# Altium PCB T35_V2.1.PcbDoc (part 1 of 5)
Units mil, origin at the board's own origin, x right, y up, seen from the top; angles counter-clockwise.
Board outline 2372.44 x 1023.62 mil, 12 copper layers (TOP, L2-G, L3, L4-G, L5, L6-V, L7-V, L8, L9-G, L10, L11-G, BOTTOM), stack 62.192 mil thick; 356 components, 288 nets, 1478 pads, 832 vias.
Unrouted connection lines stored in the file: 19.
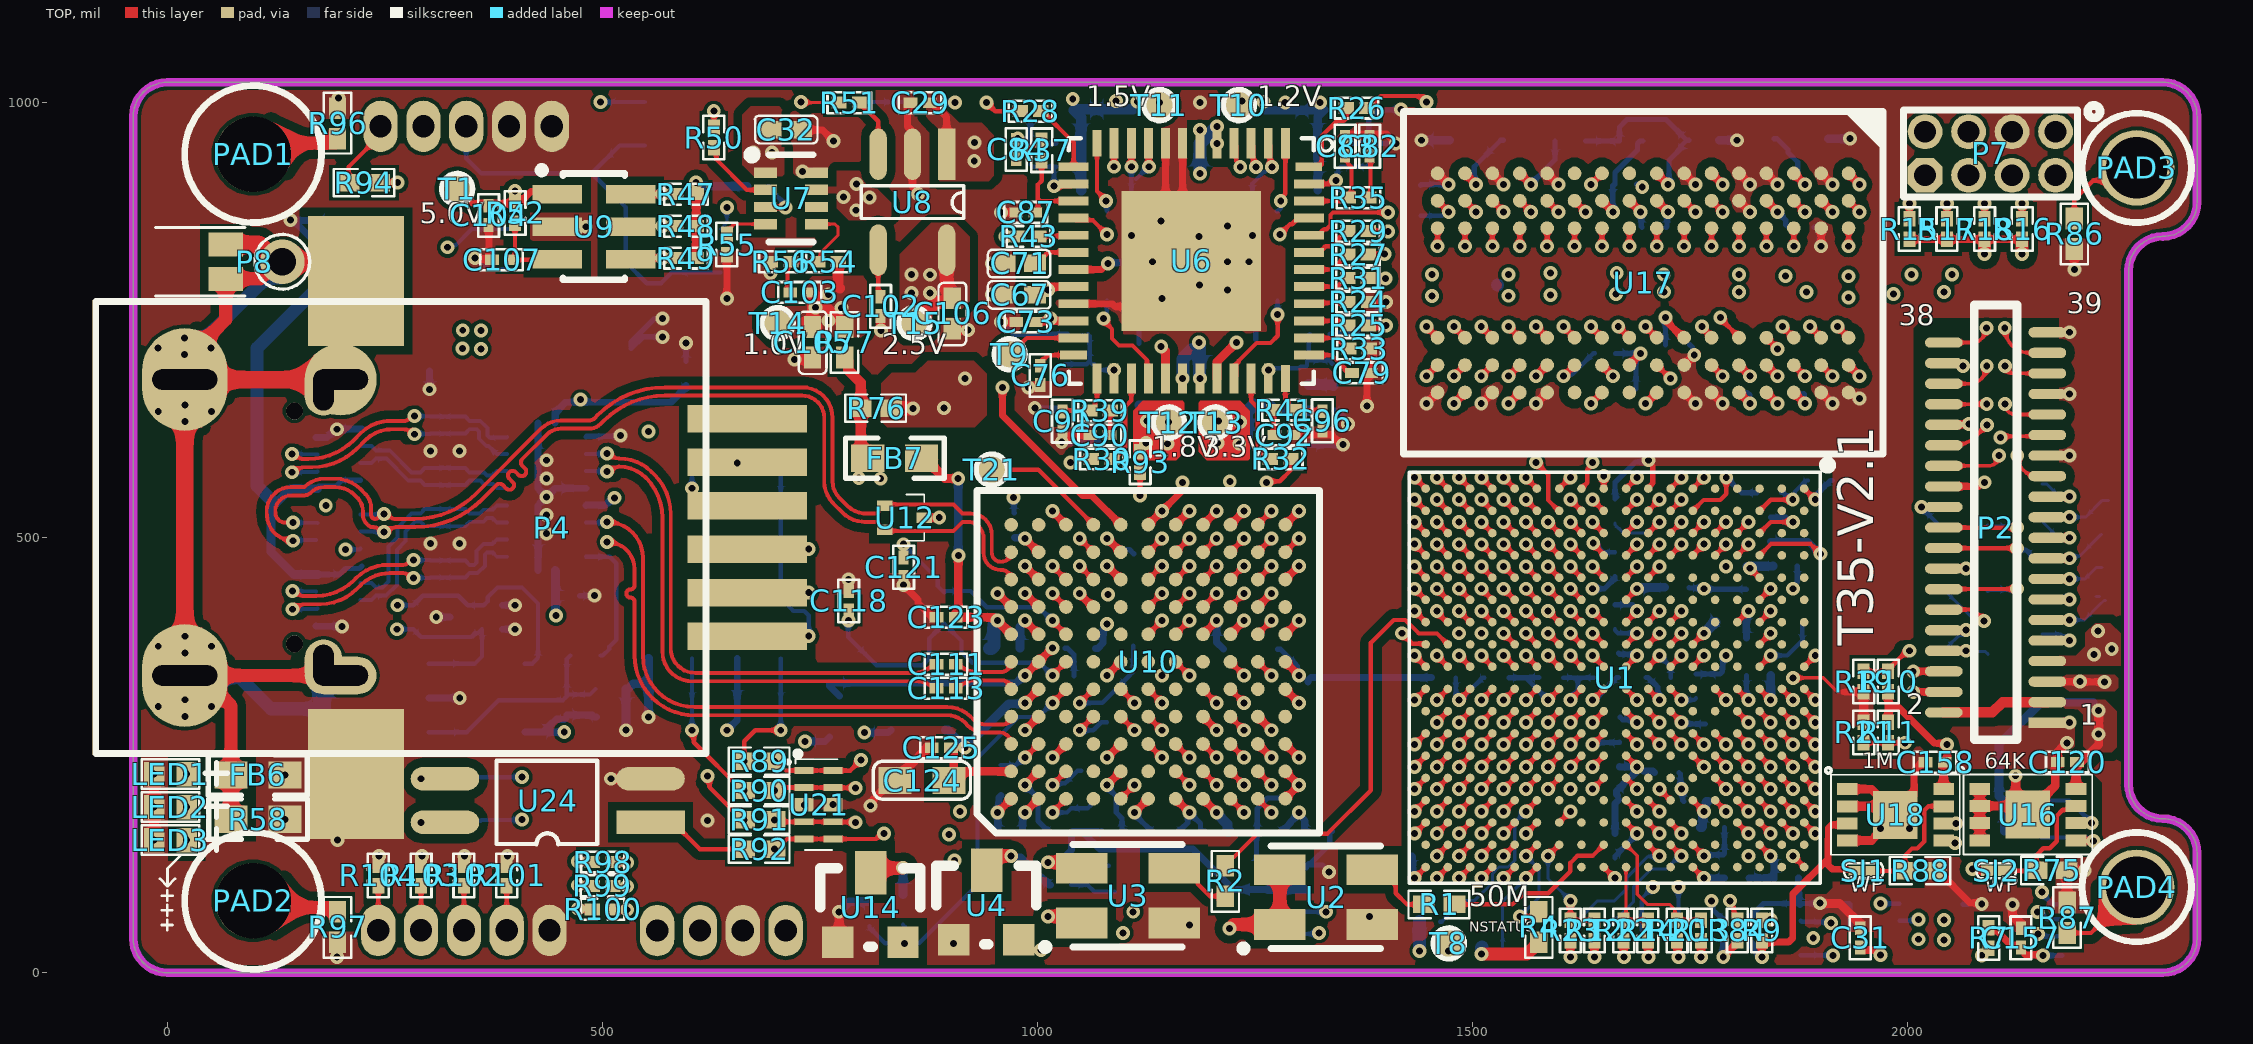
[diagram p0: TOP view]
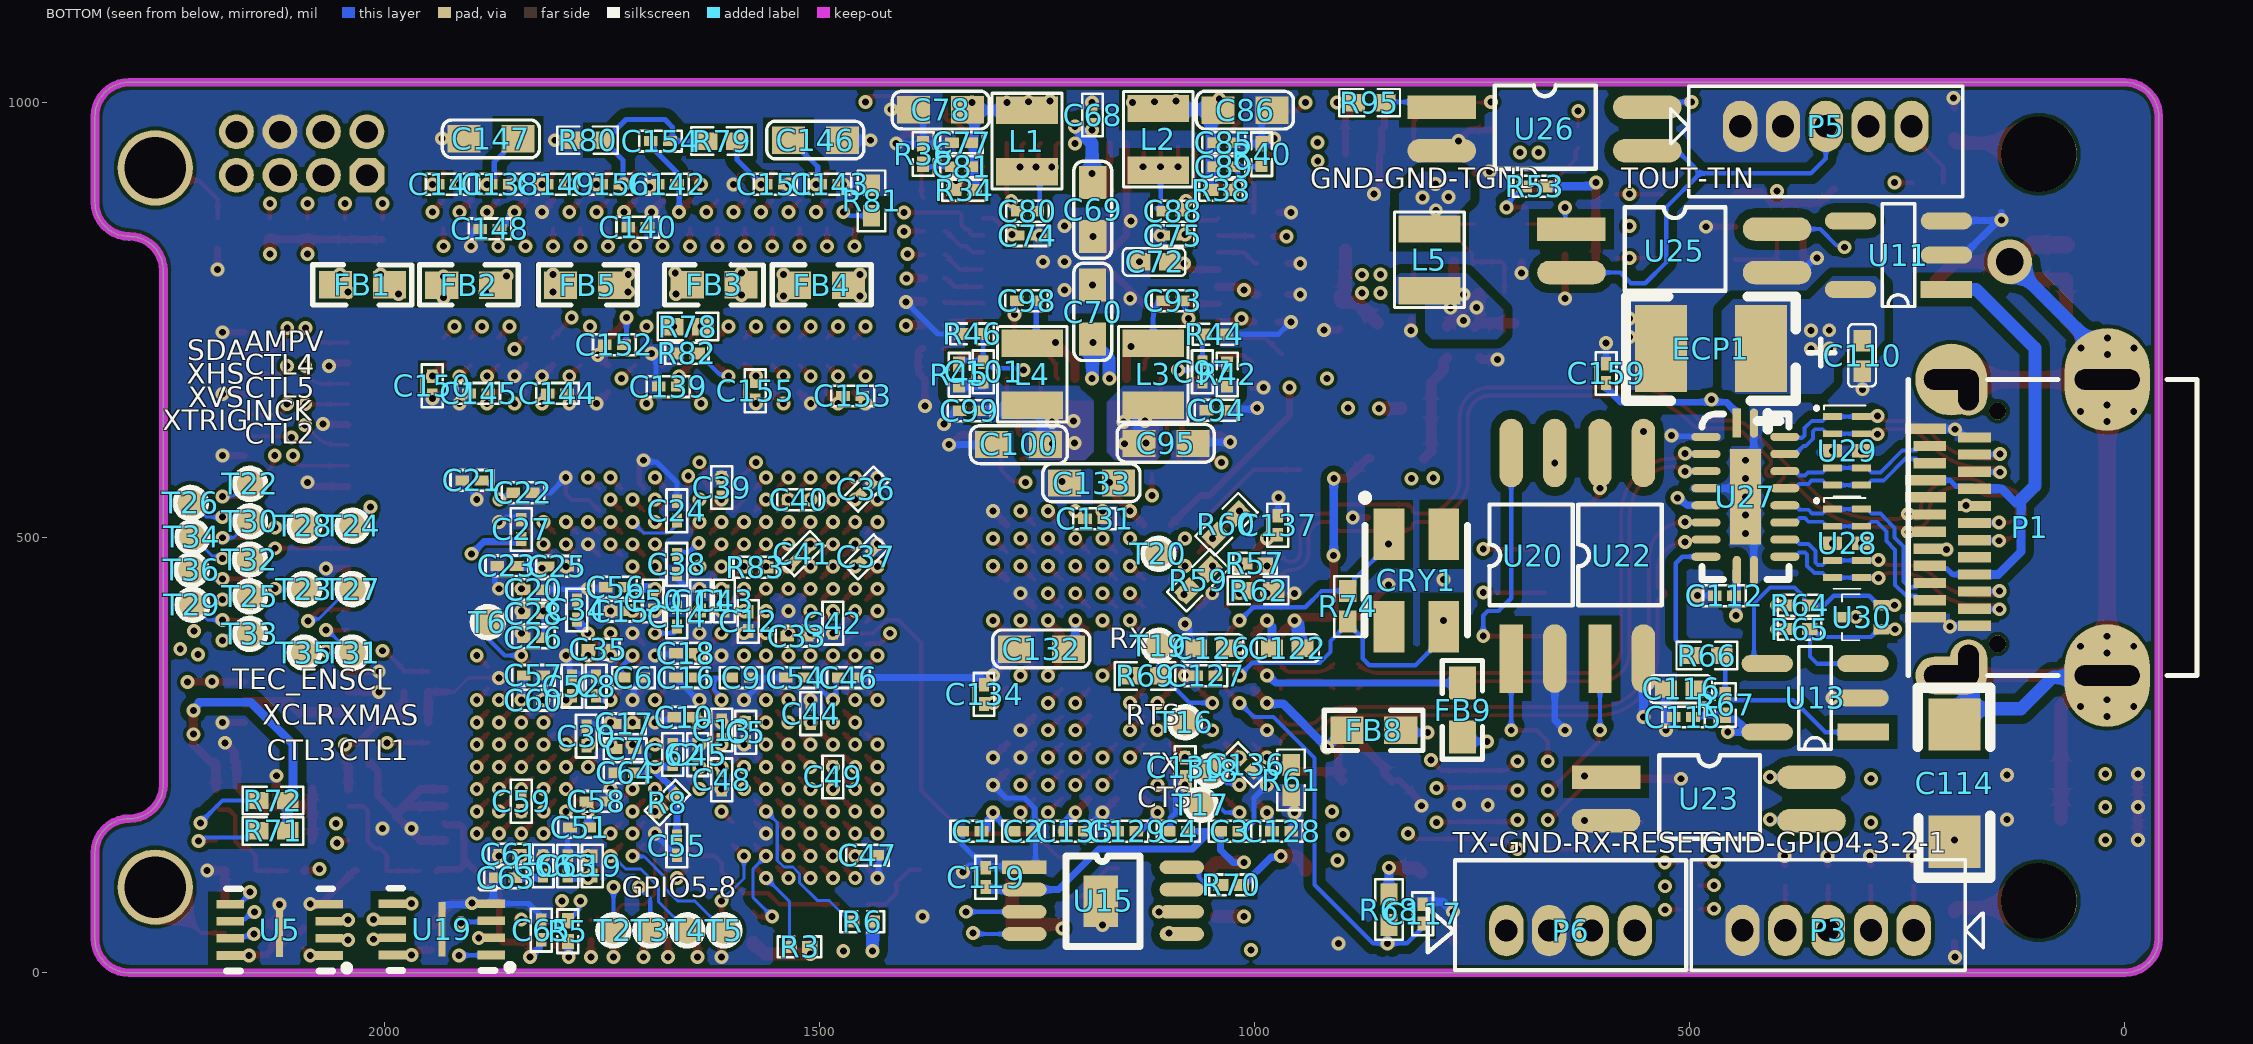
[diagram p1: BOTTOM view, seen from below]
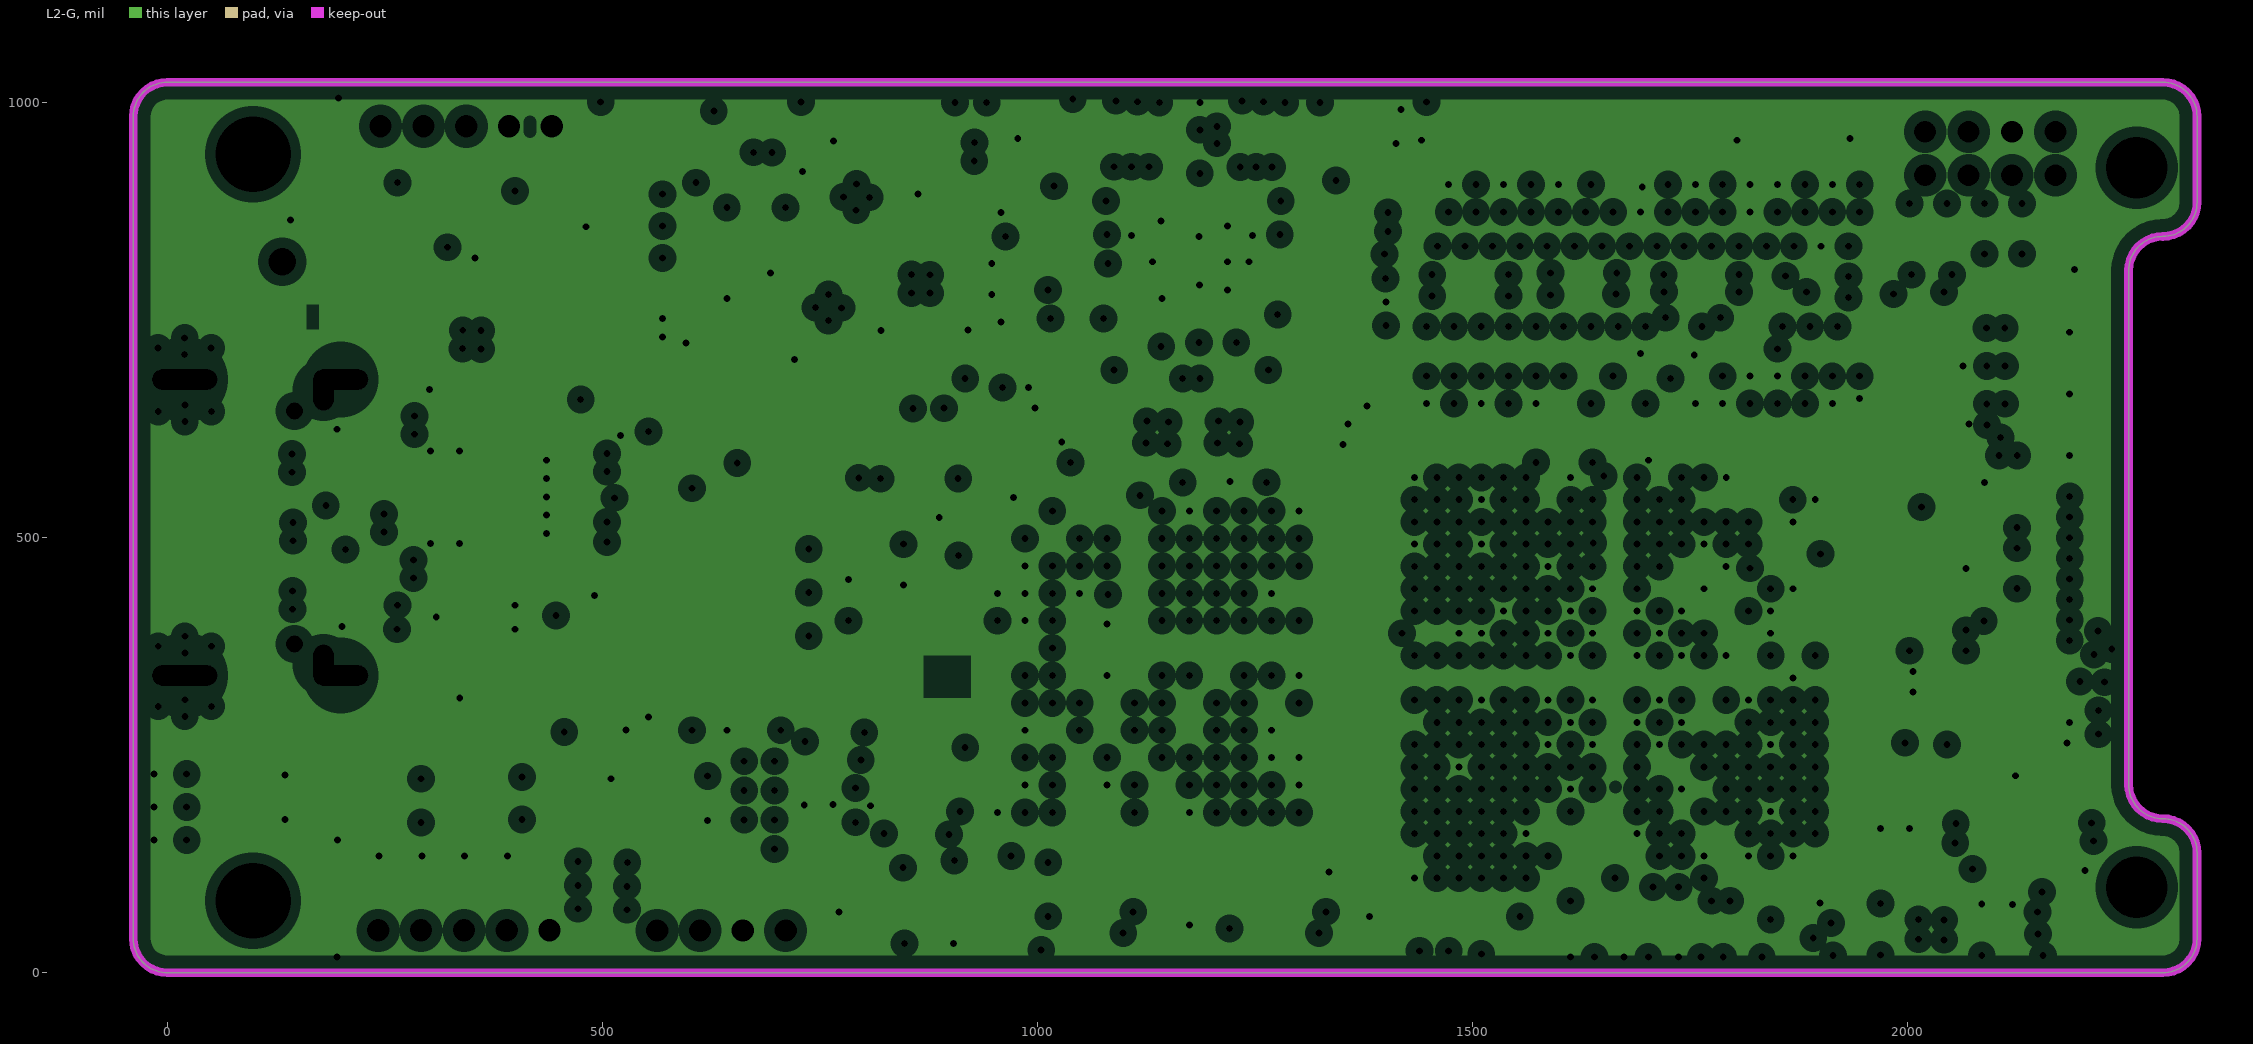
[diagram p2: L2-G, clearances drawn from the general rule]
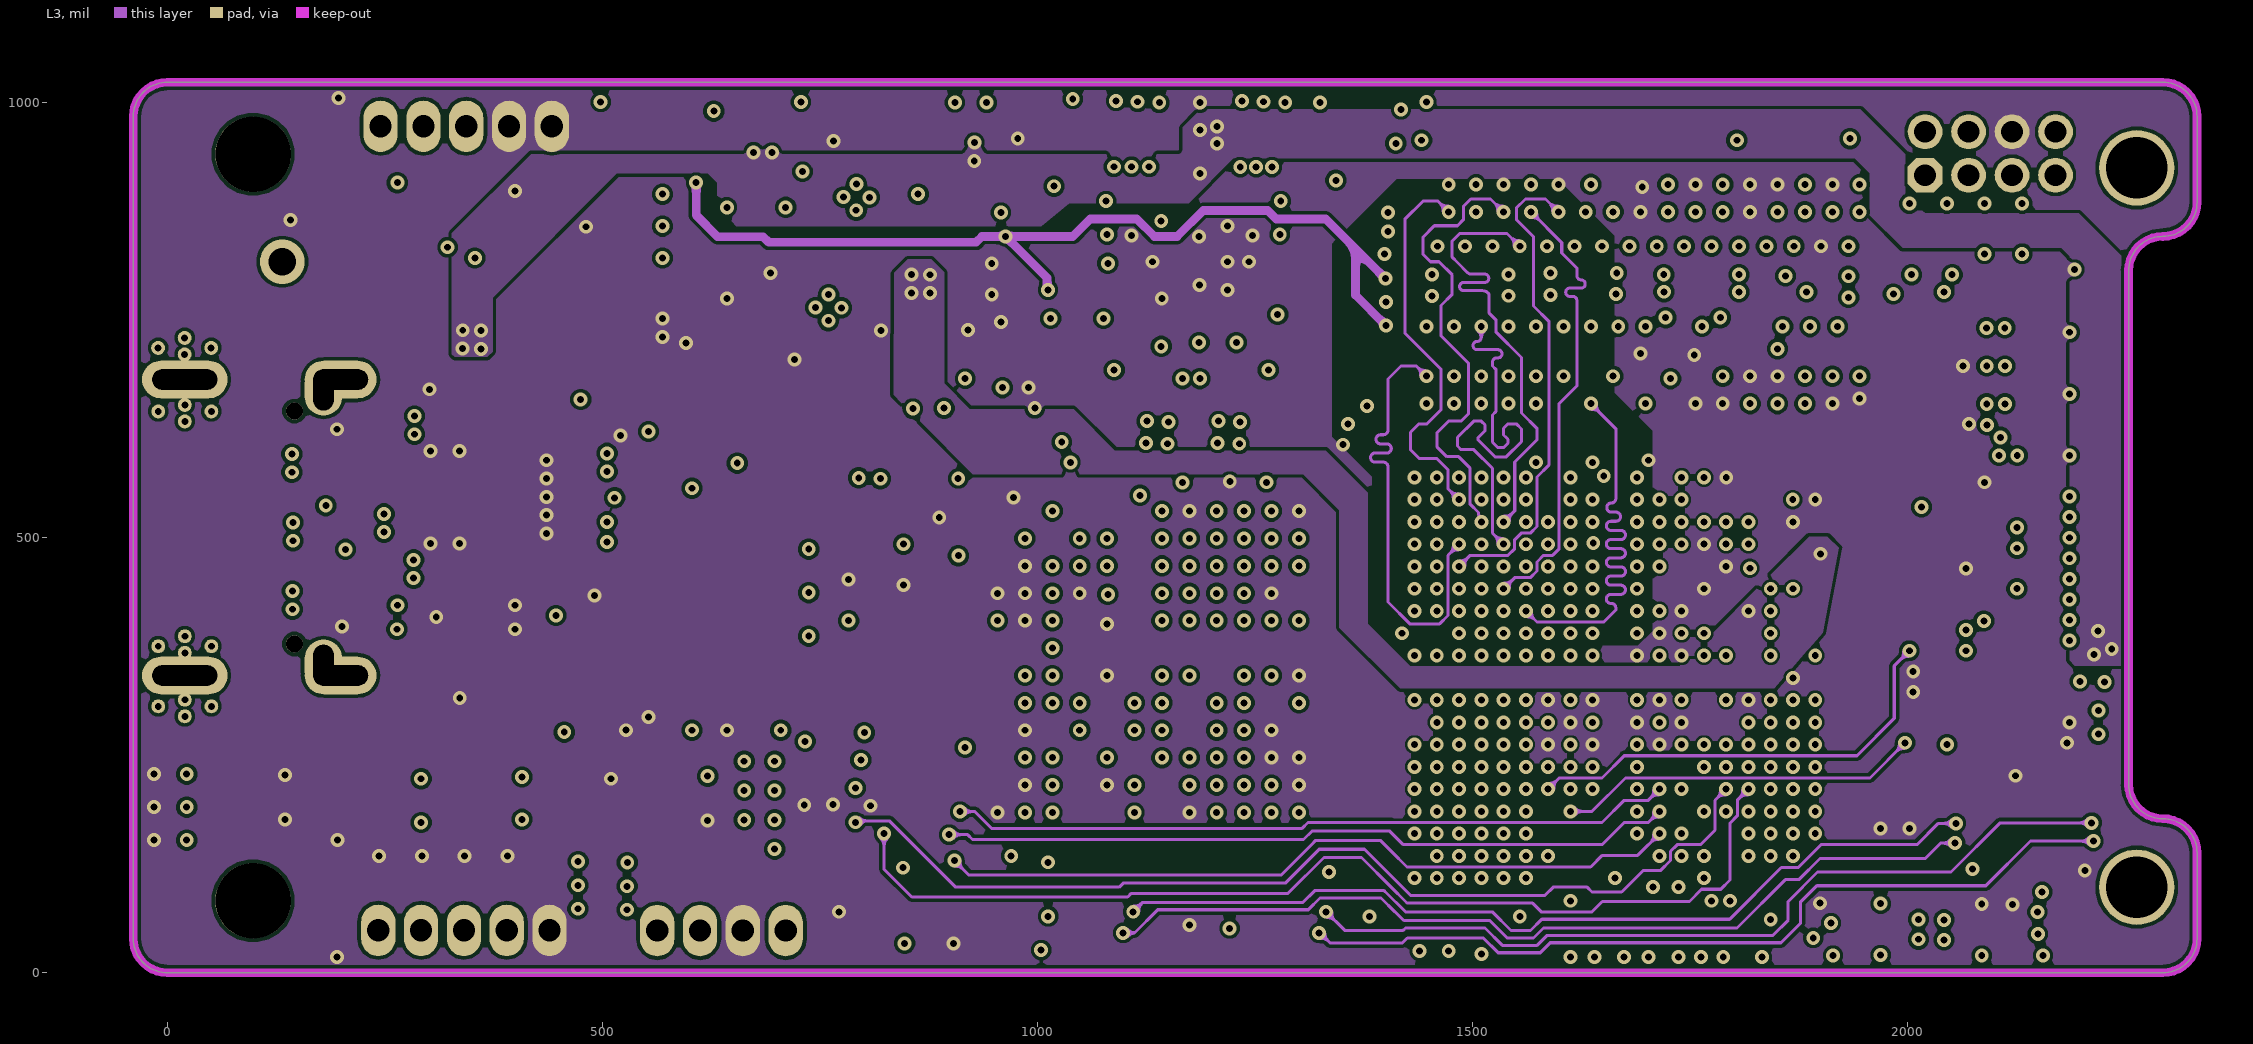
[diagram p3: L3]
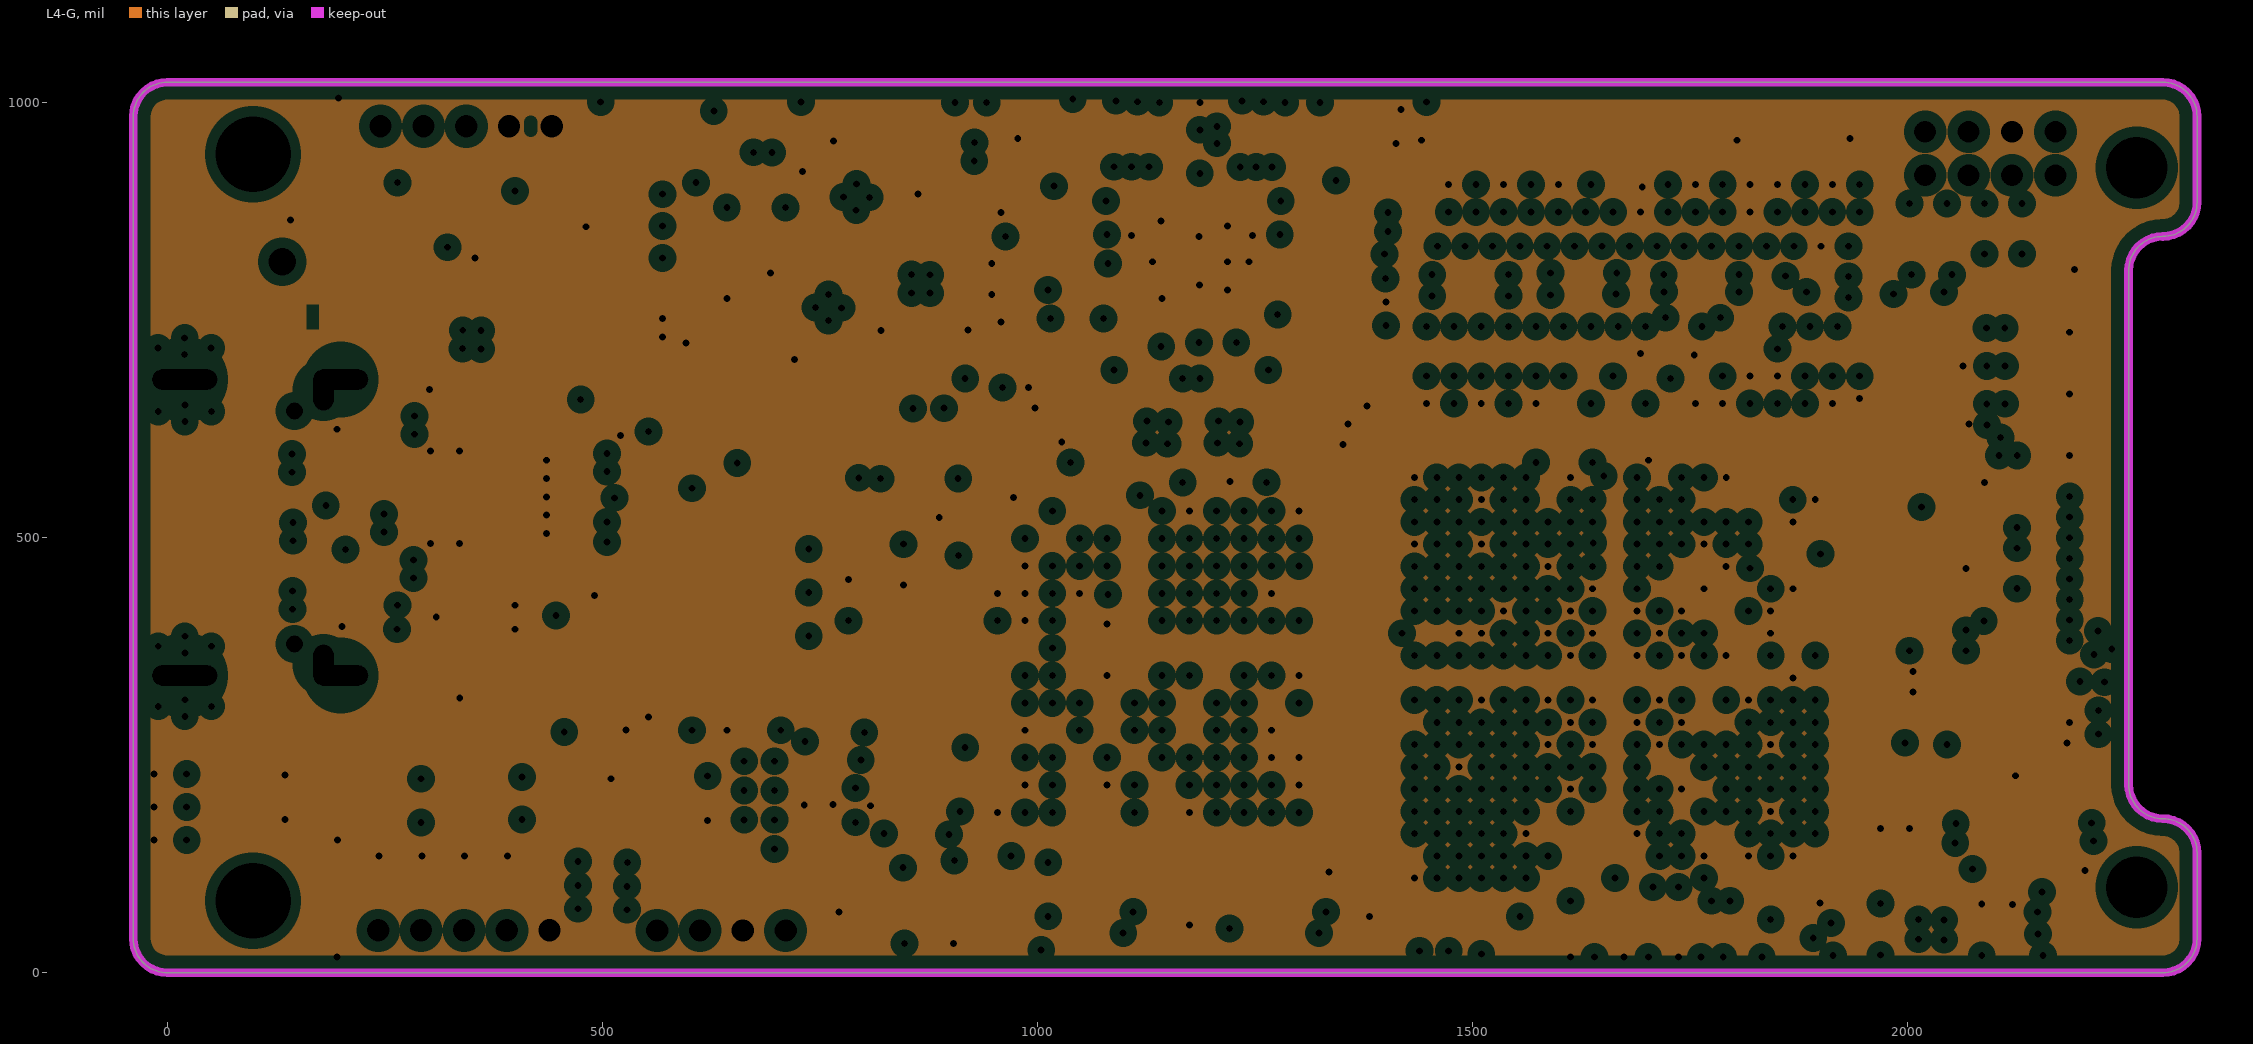
[diagram p4: L4-G, clearances drawn from the general rule]
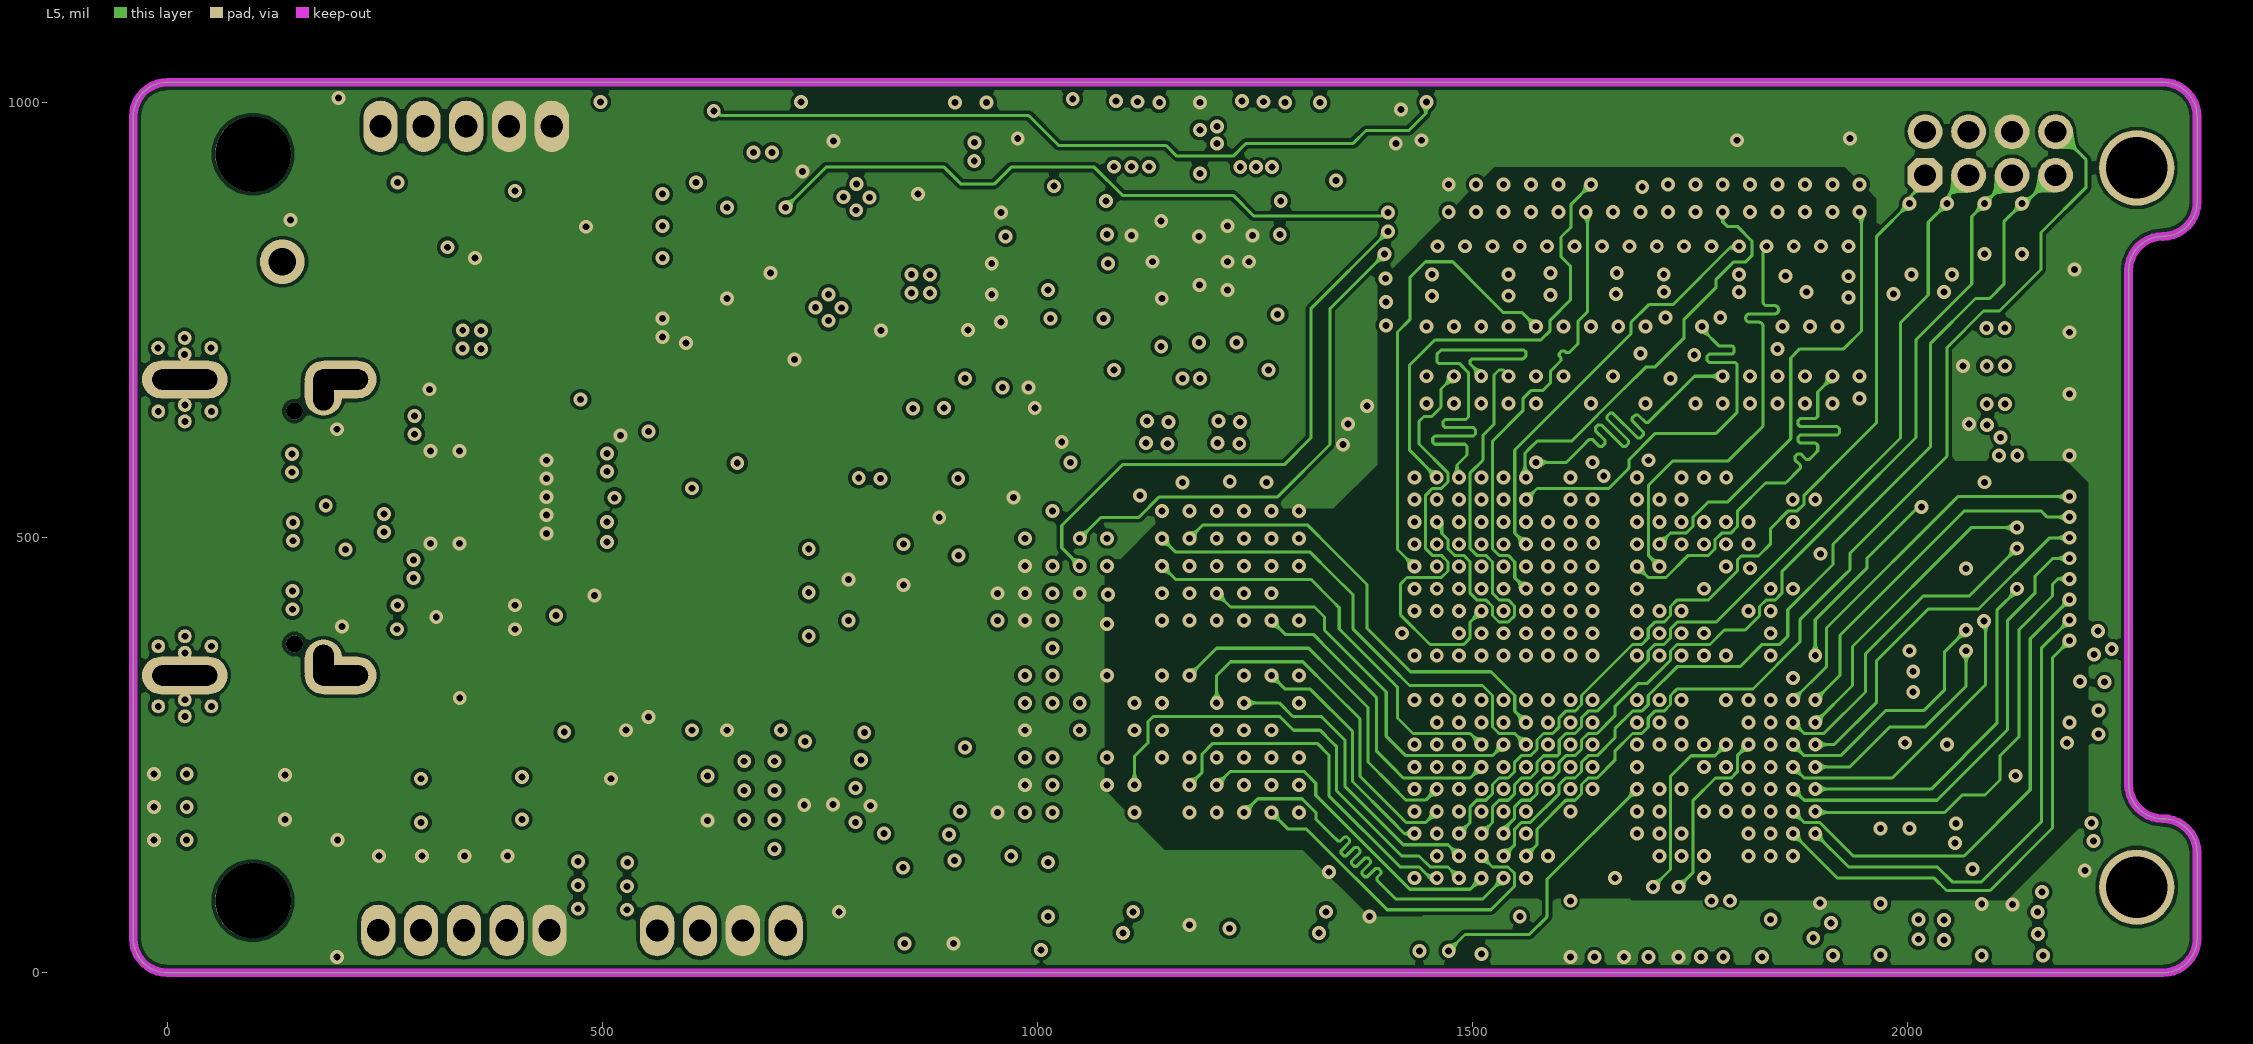
[diagram p5: L5]
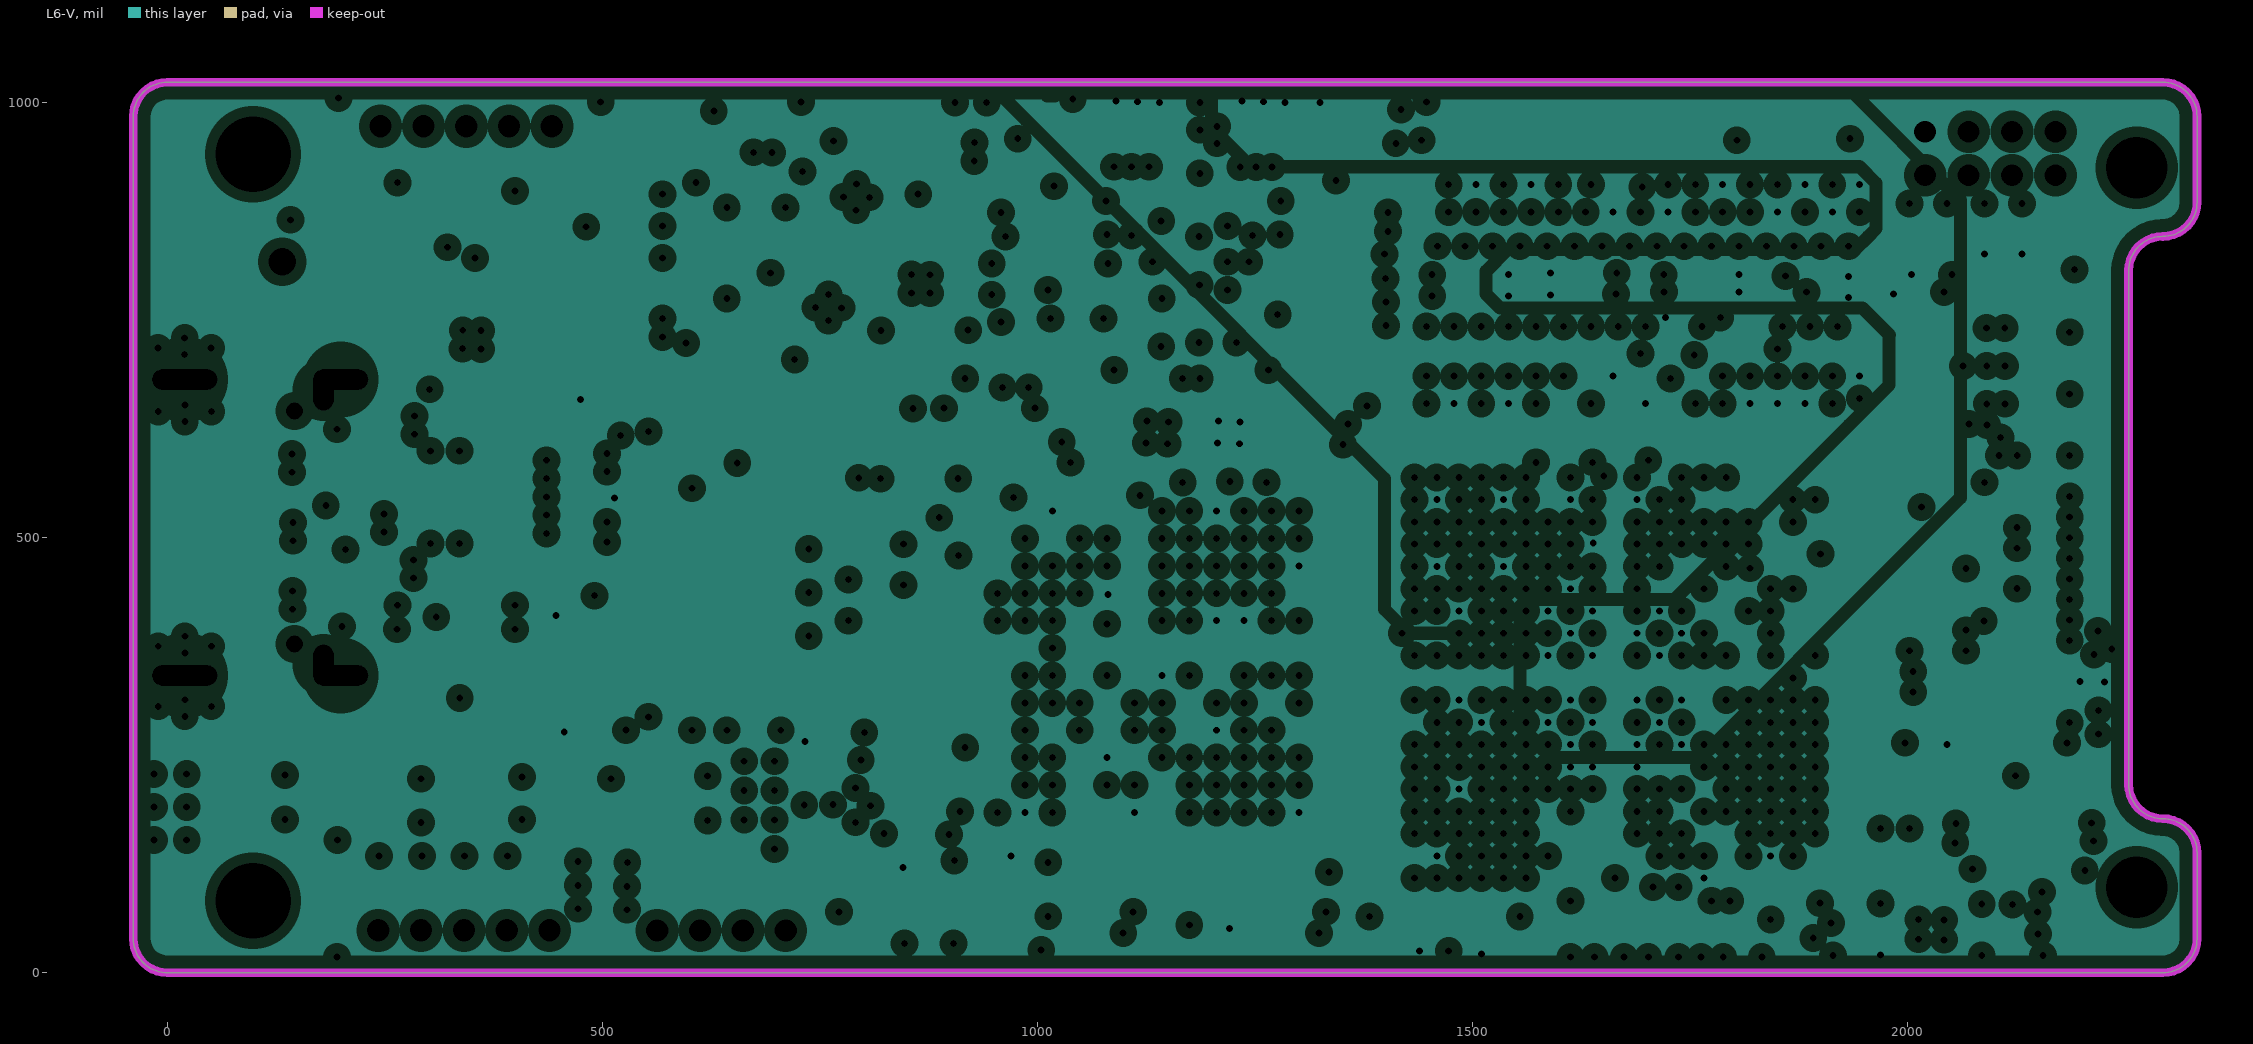
[diagram p6: L6-V, clearances drawn from the general rule]
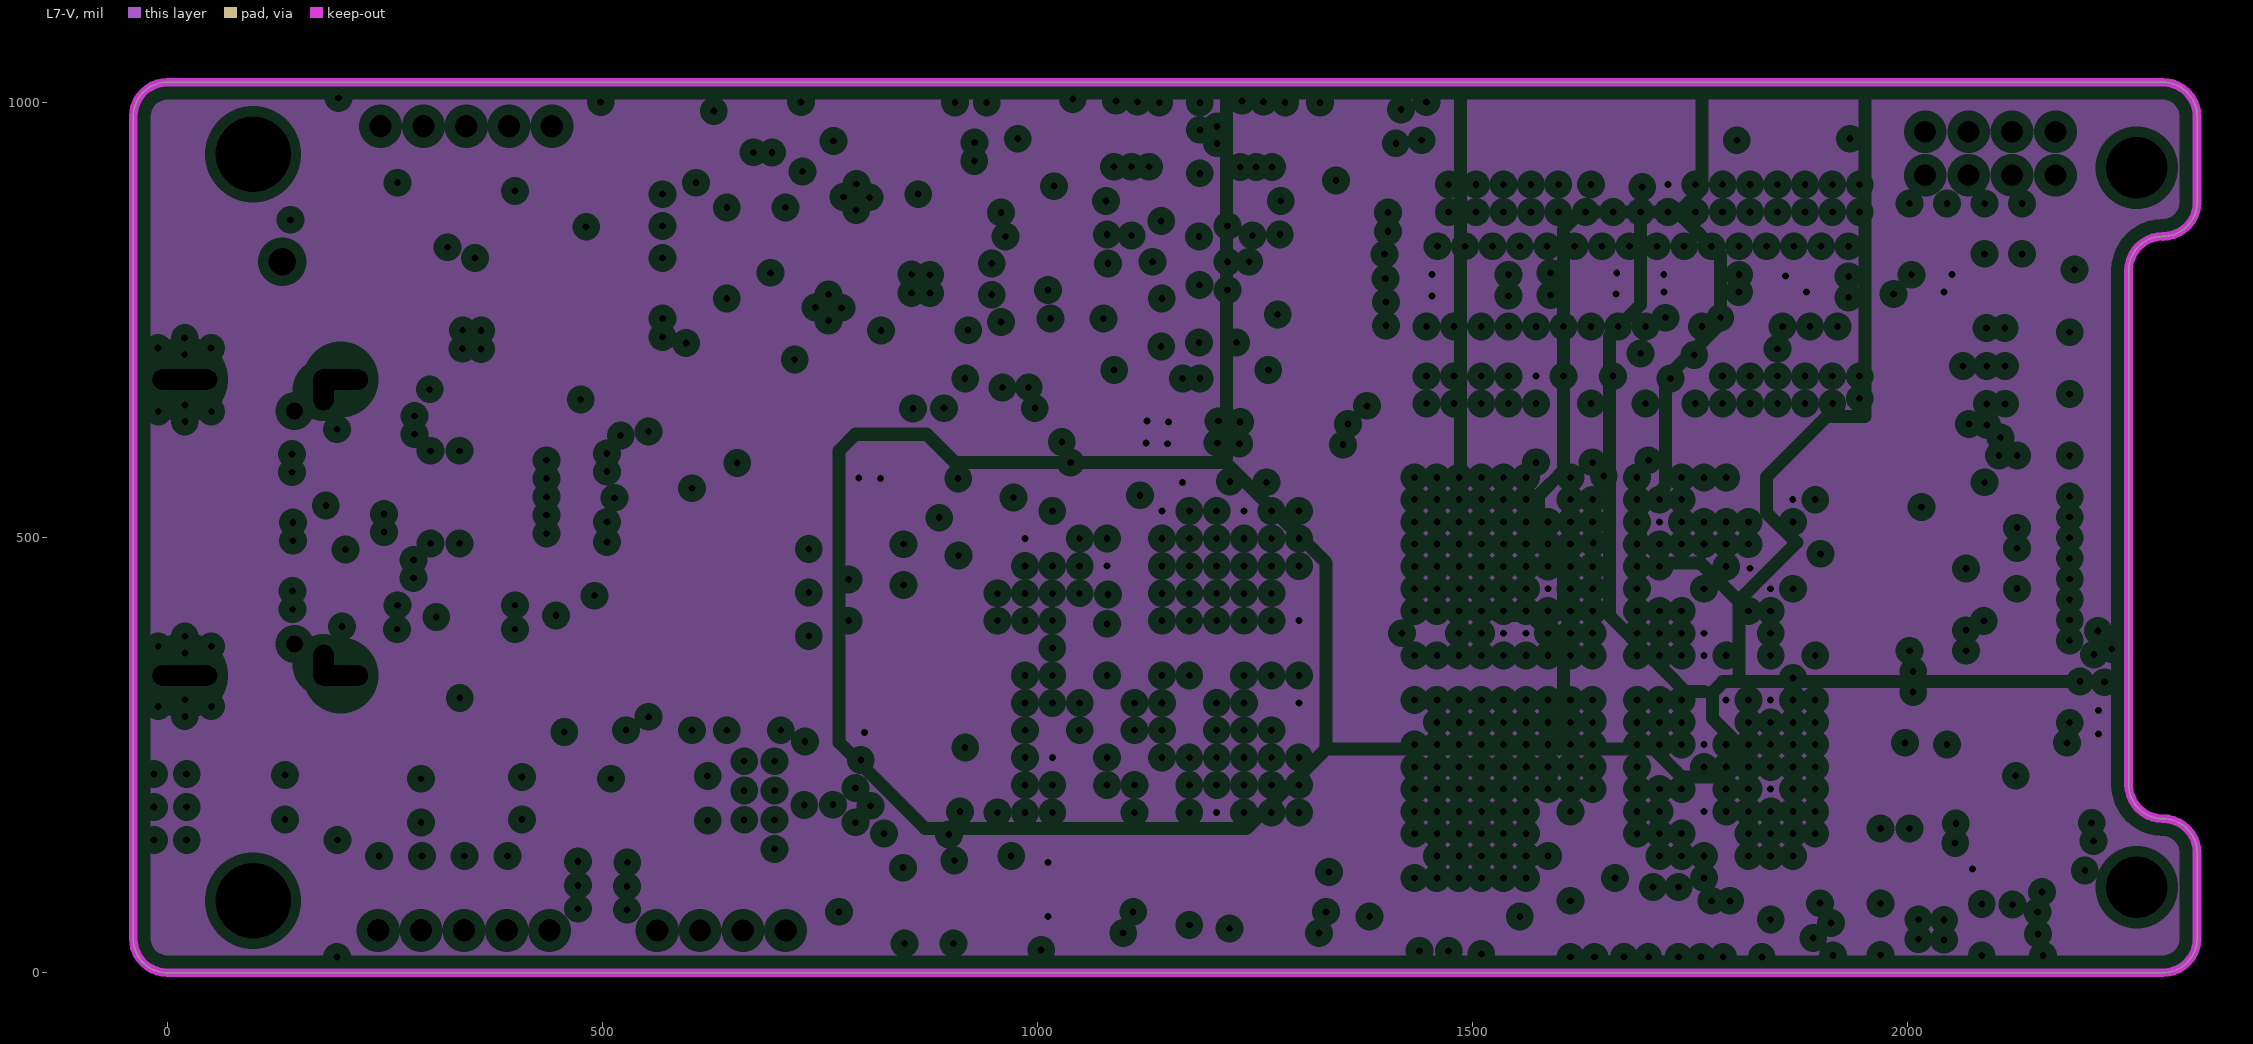
[diagram p7: L7-V, clearances drawn from the general rule]
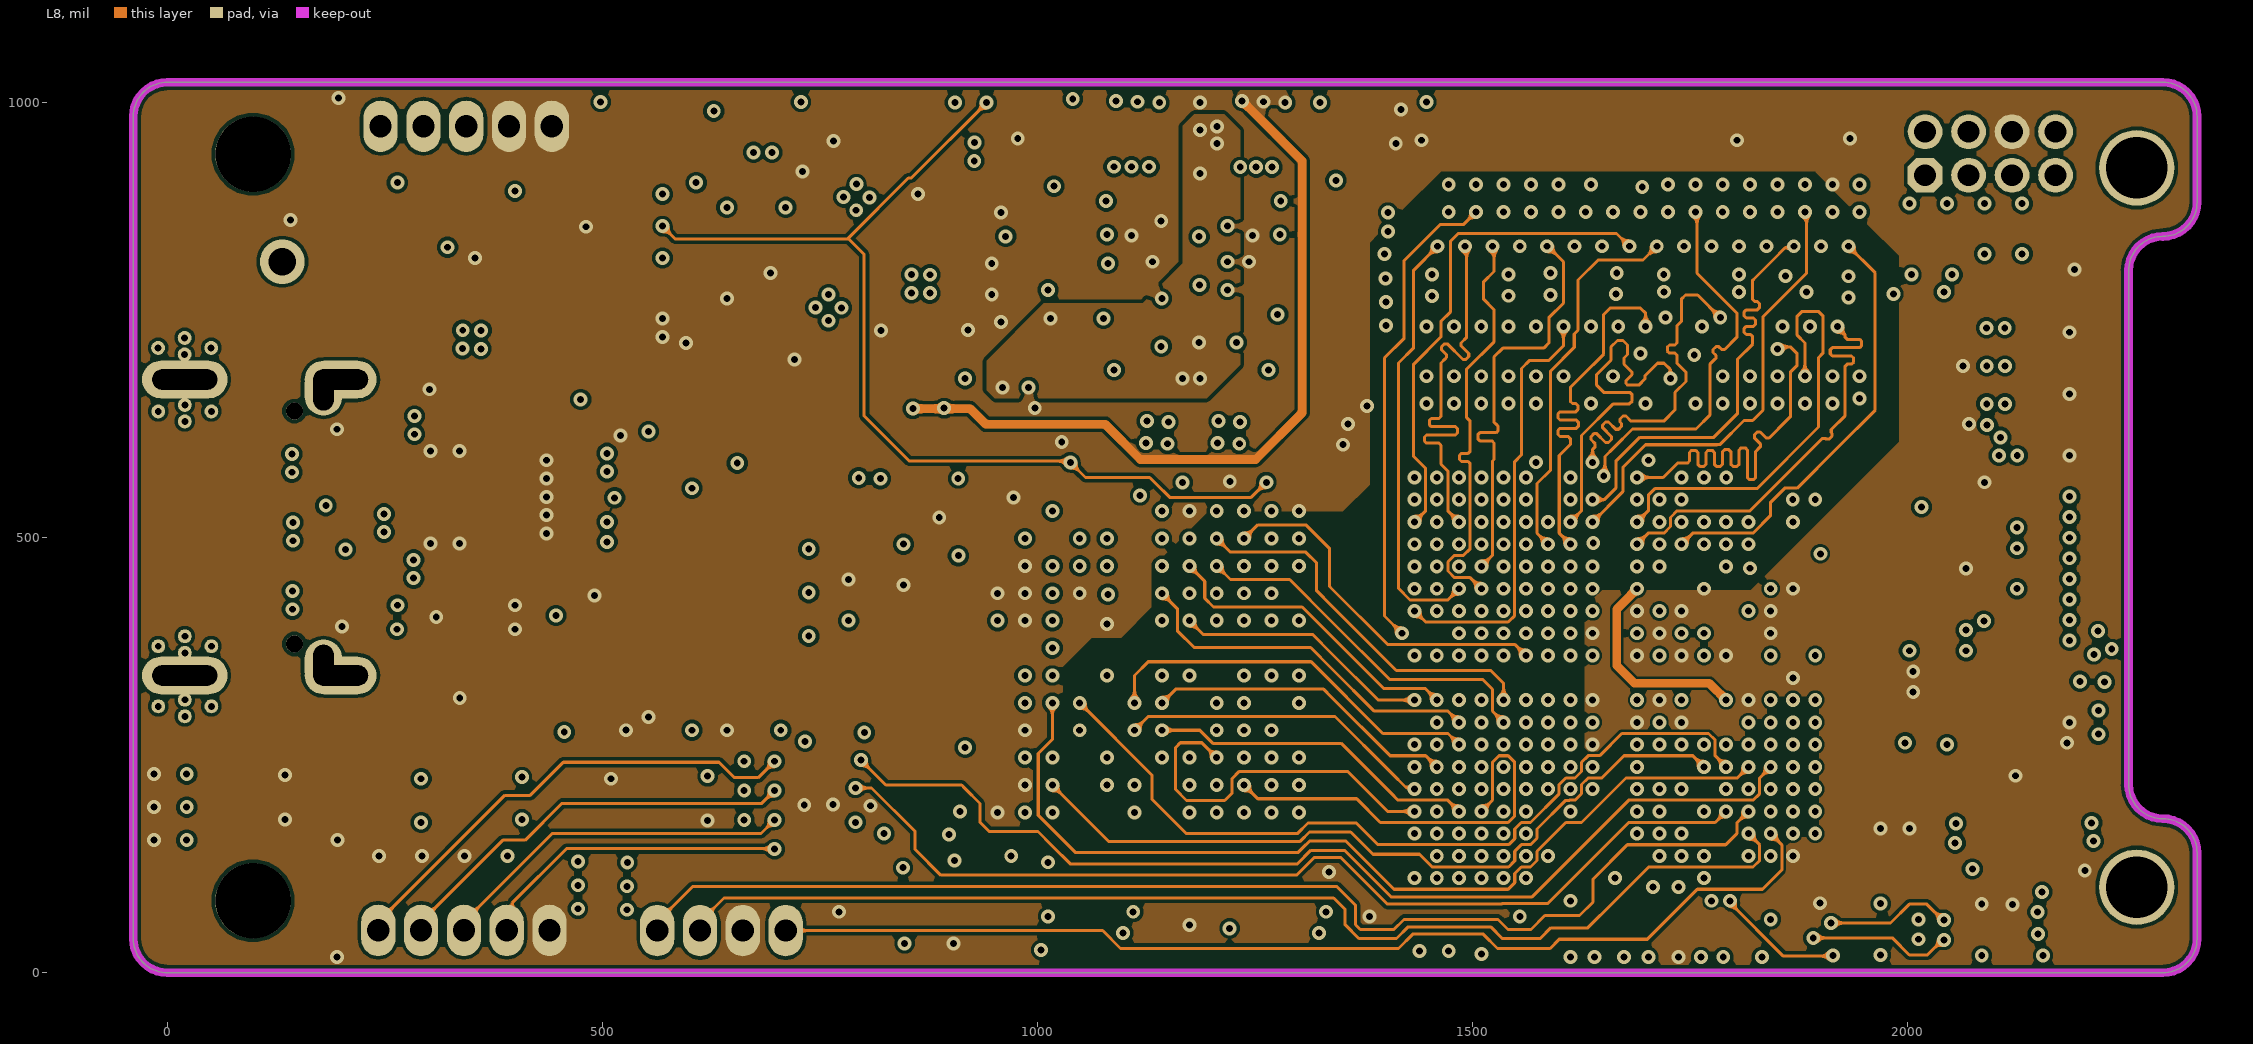
[diagram p8: L8]
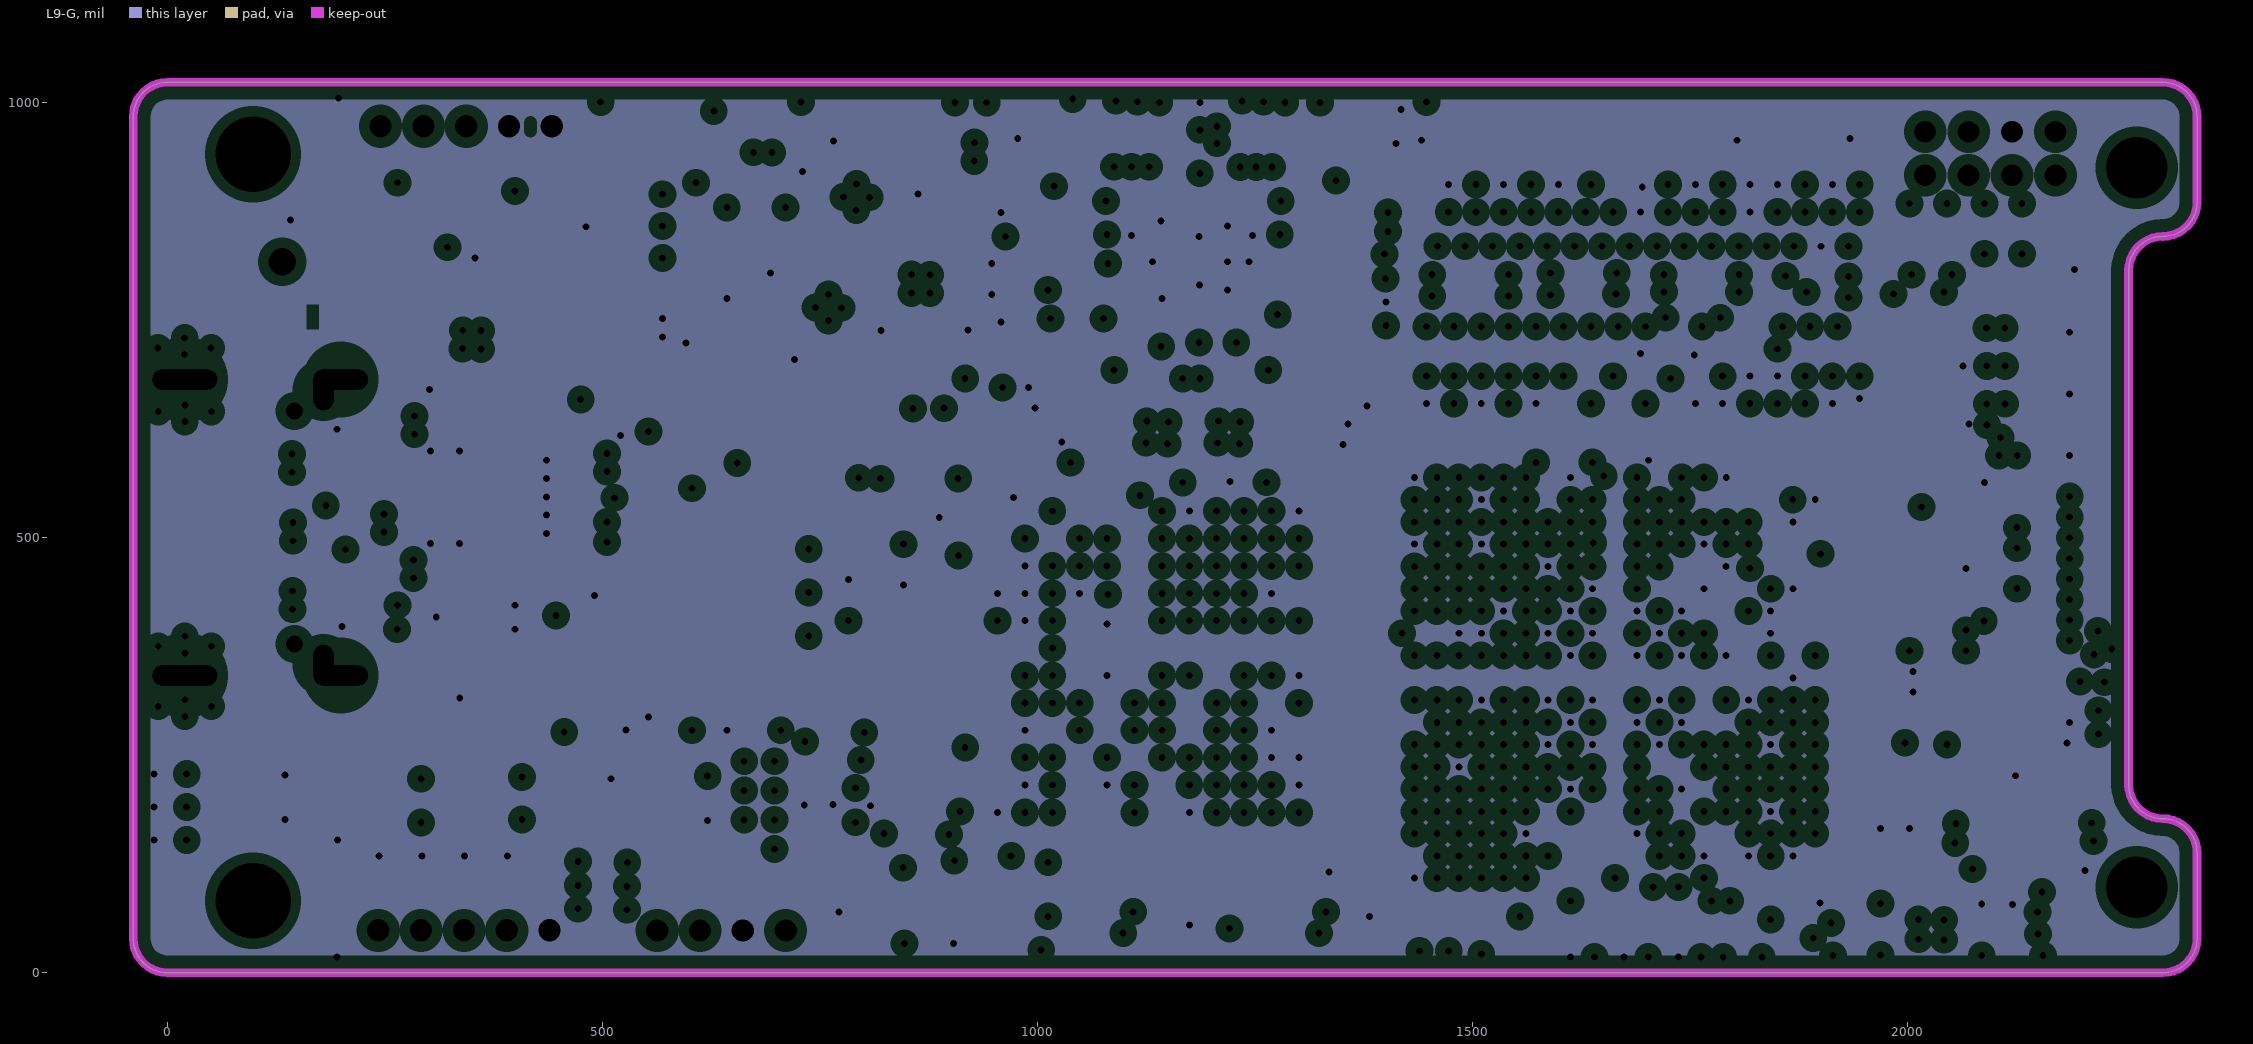
[diagram p9: L9-G, clearances drawn from the general rule]
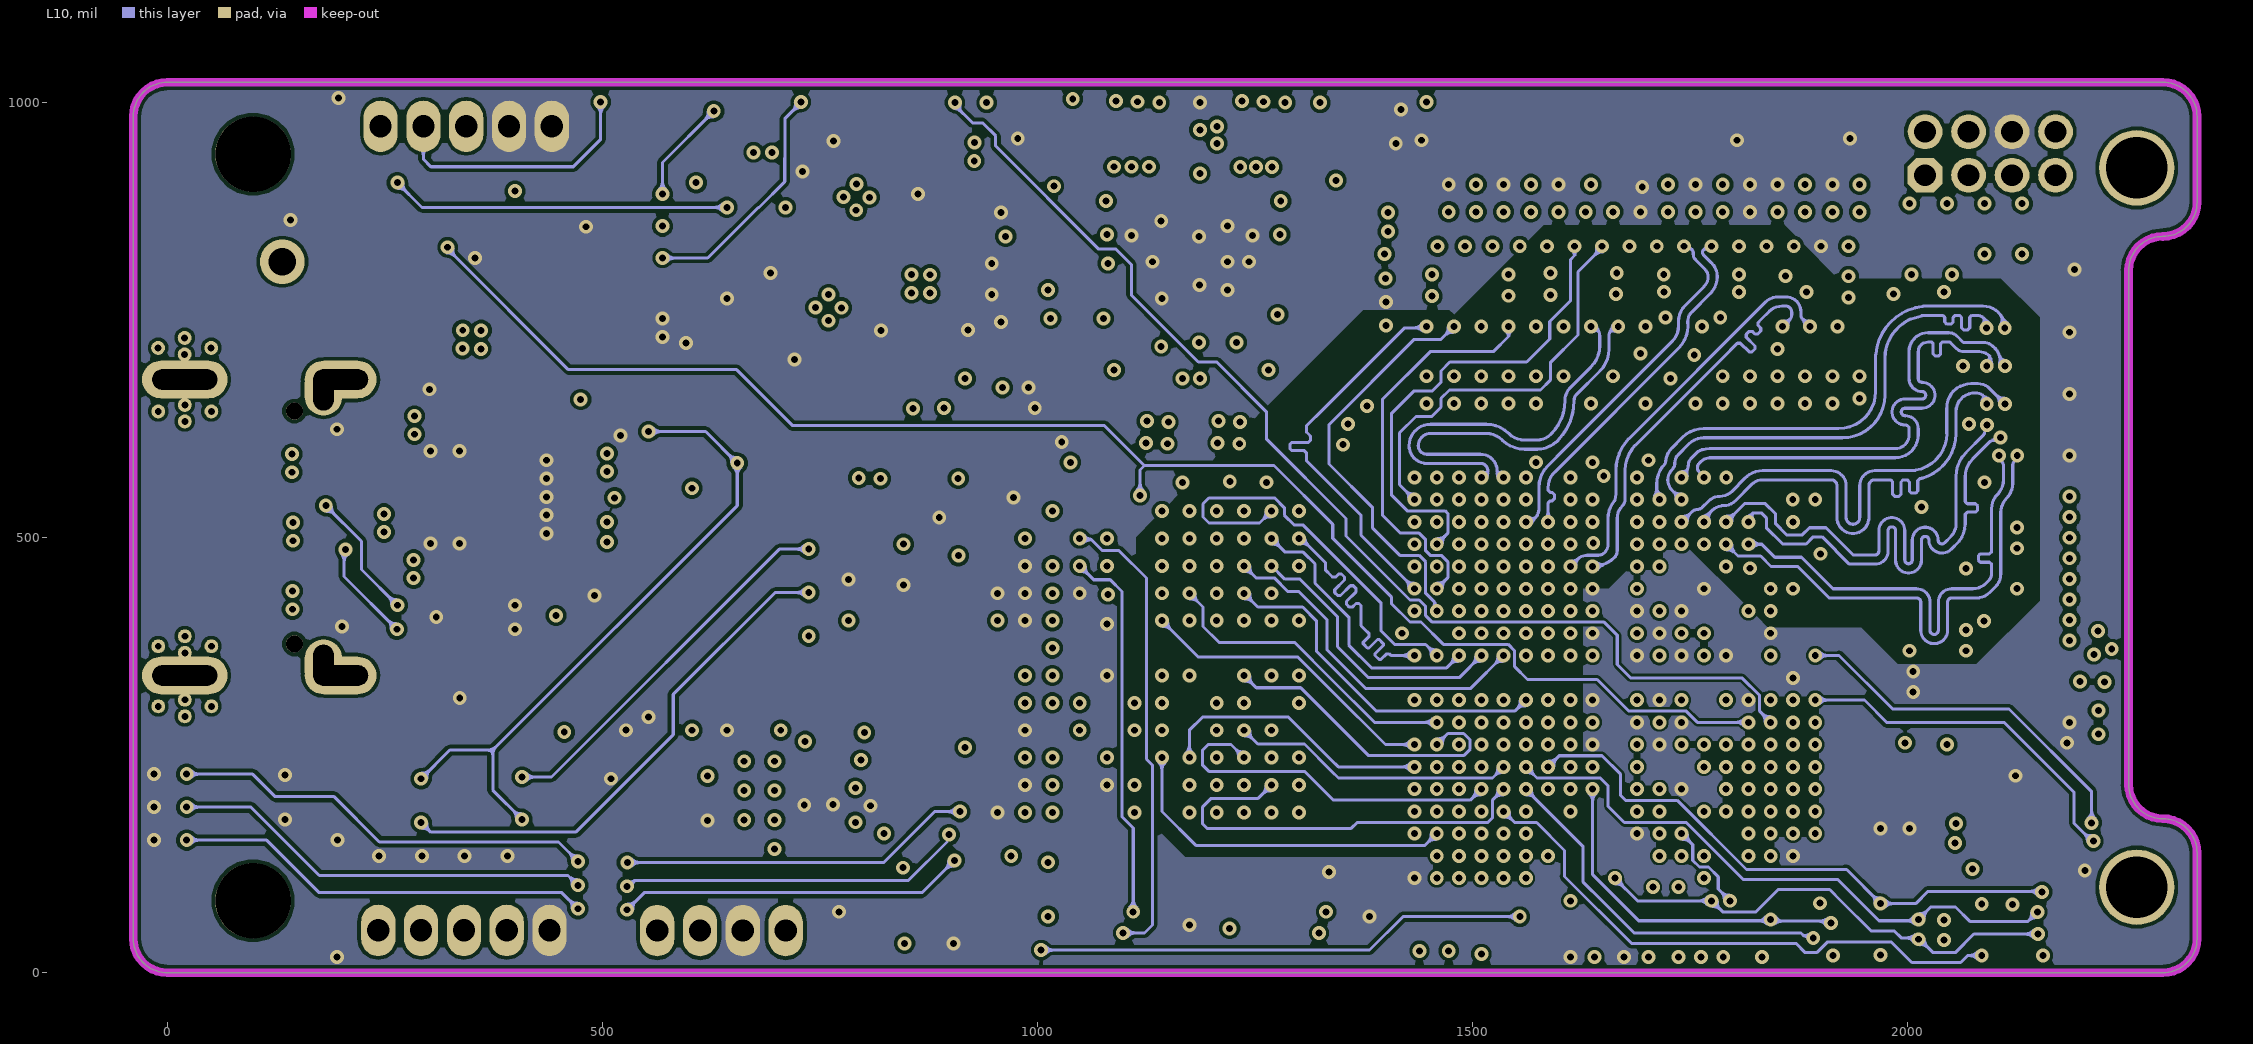
[diagram p10: L10]
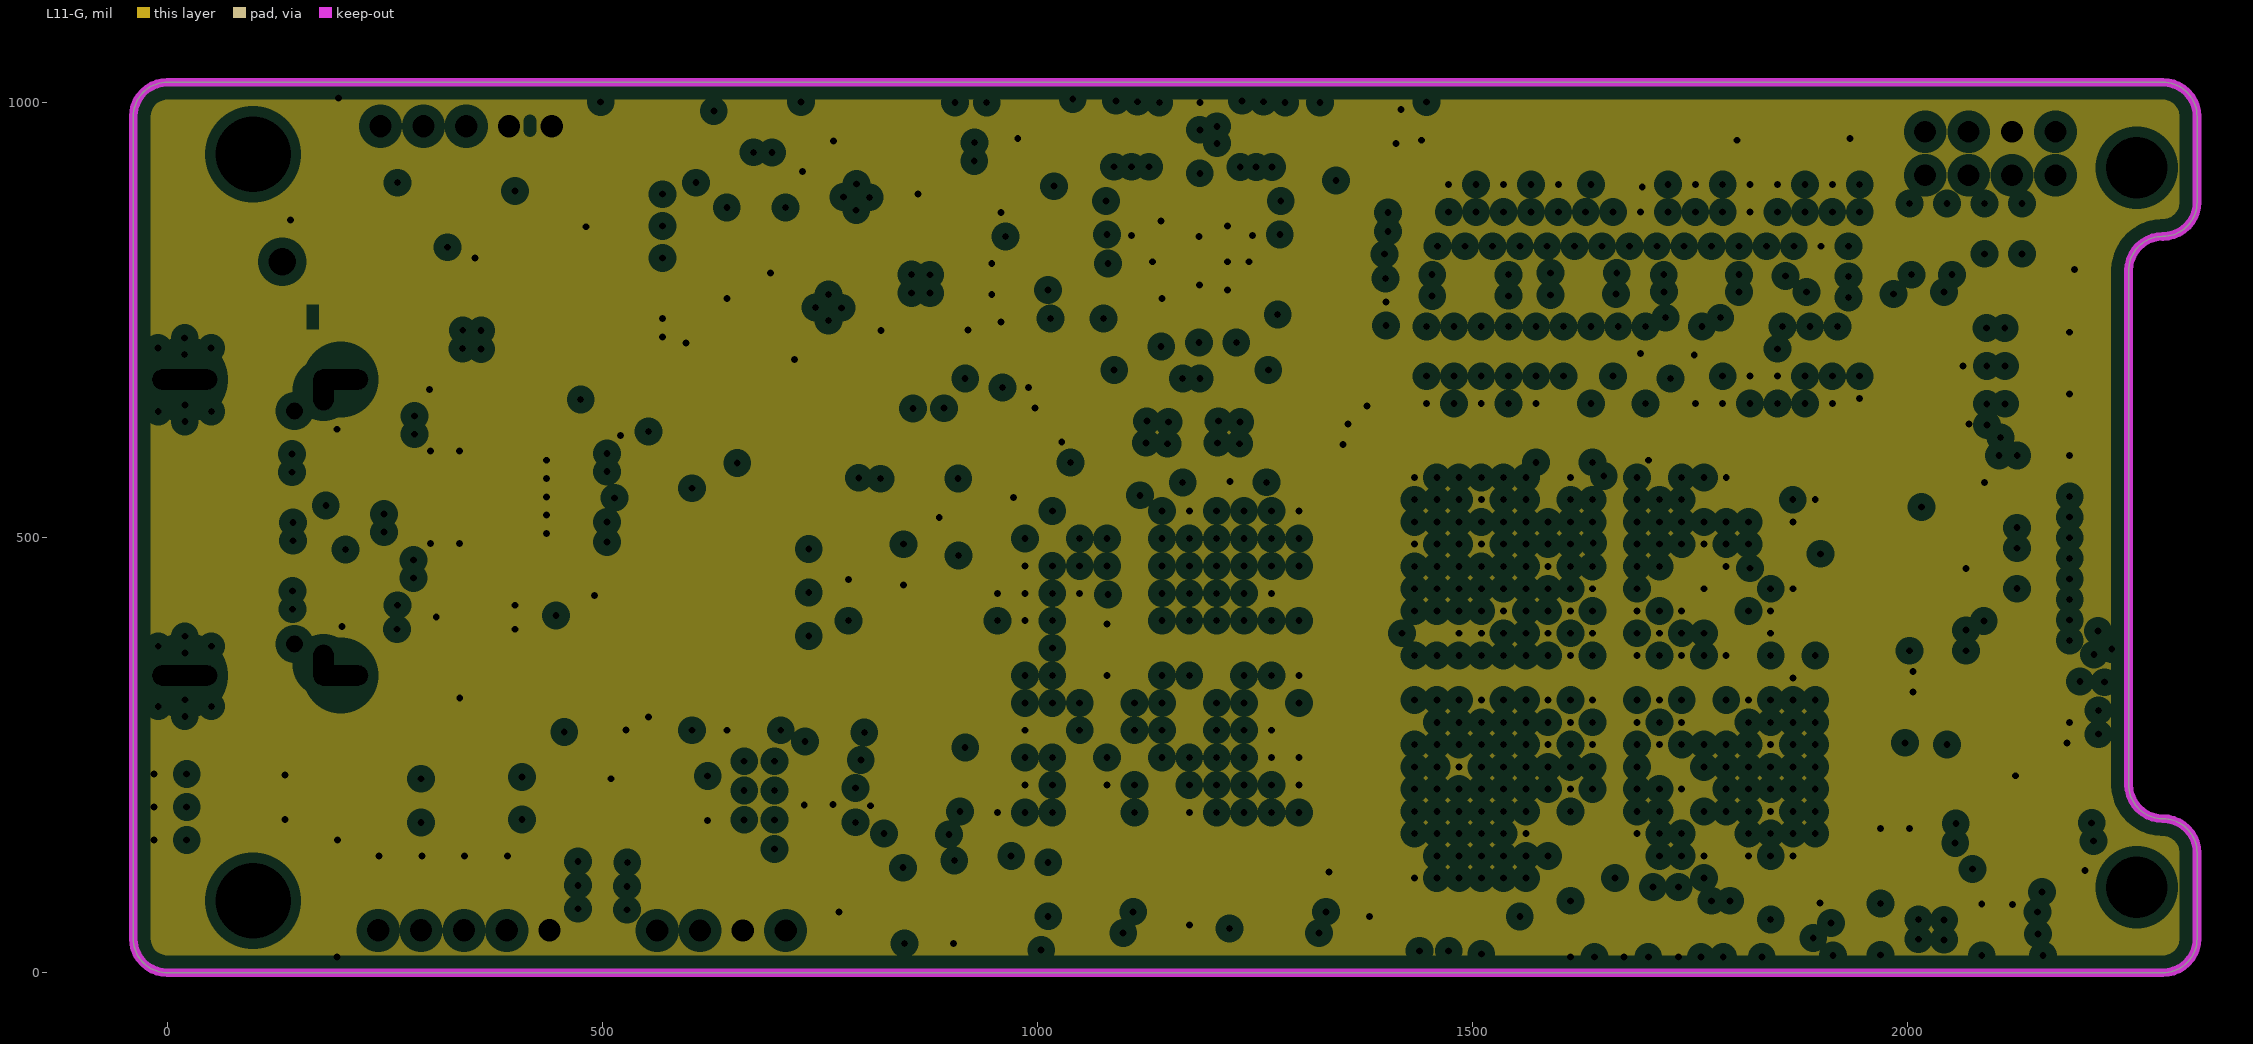
[diagram p11: L11-G, clearances drawn from the general rule]
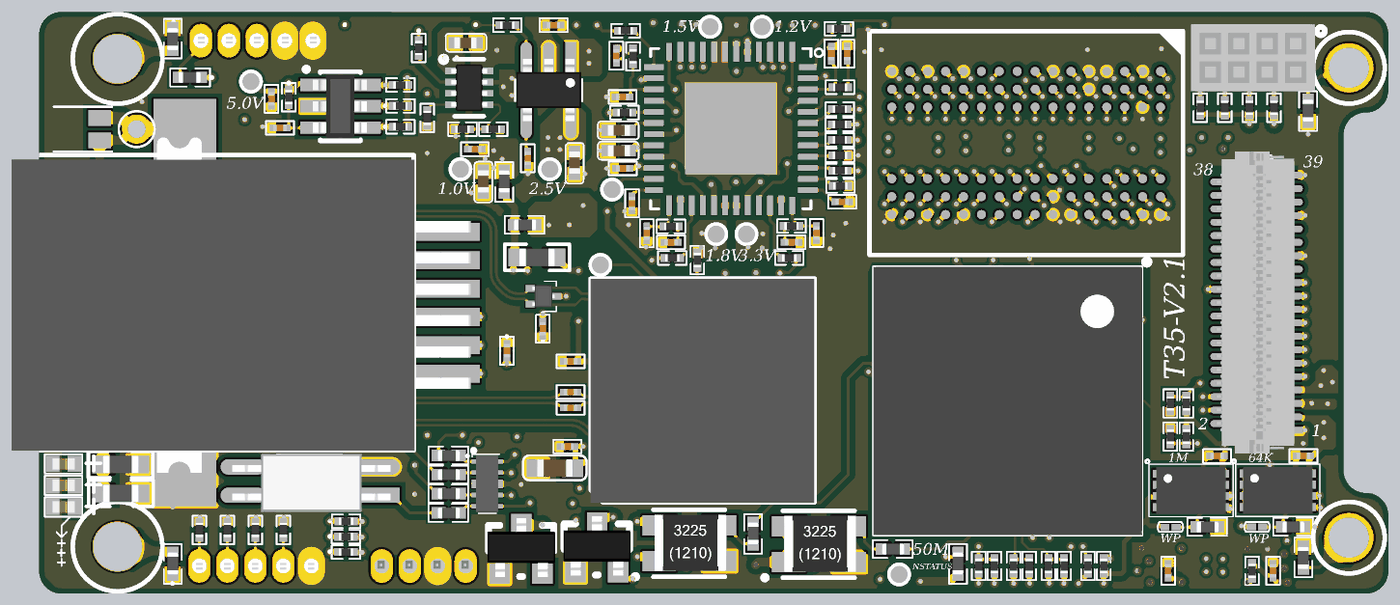
[diagram p16: 3D render of the assembled board from above, using the file's embedded part models]
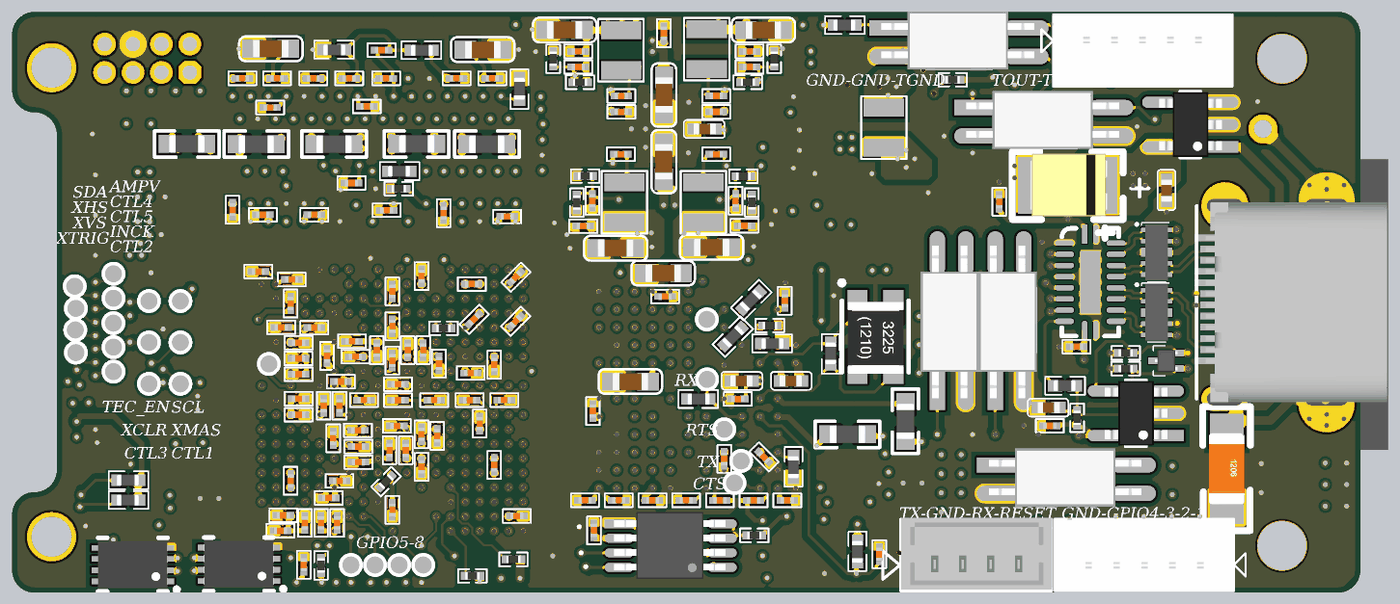
[diagram p17: 3D render of the assembled board from below, using the file's embedded part models]

## Layer stack, top to bottom
Top Solder: solder mask 0.4, Solder Resist, Dk 3.5
TOP: signal copper 1.4
Dielectric1: core 3.937, FR-4, Dk 4.8
L2-G: plane copper 1.4169, net GND
Dielectric9: prepreg 3.937, Dk 4.2
L3: signal copper 1.4169
Dielectric2: core 3.937, Dk 4.2
L4-G: plane copper 1.4169, net GND
Dielectric10: prepreg 3.937, Dk 4.2
L5: signal copper 1.4169
Dielectric3: core 3.937, Dk 4.2
L6-V: plane copper 1.4, net (Multiple Nets)
Dielectric13: prepreg 4.8386, FR-4, Dk 4.8
L7-V: plane copper 1.4, net (Multiple Nets)
Dielectric14: core 3.937, FR-4, Dk 4.8
L8: signal copper 1.4169
Dielectric4: prepreg 3.937, Dk 4.2
L9-G: plane copper 1.4024, net GND
Dielectric11: core 3.937, Dk 4.2
L10: signal copper 1.4169
Dielectric5: prepreg 5, Dk 4.2
L11-G: plane copper 1.4169, net GND
Dielectric12: core 3.937, Dk 4.2
BOTTOM: signal copper 1.4
Bottom Solder: solder mask 0.4, Solder Resist, Dk 3.5

## Board outline
-39.37,39.37 ccw(c0,39.37) 0,0 2293.7,0 ccw(c2293.7,39.37) 2333.07,39.37 2333.07,137.8 ccw(c2293.7,137.8) 2293.7,177.17 cw(c2293.7,216.54) 2254.33,216.54 2254.33,807.09 cw(c2293.7,807.09) 2293.7,846.46 ccw(c2293.7,885.83) 2333.07,885.83 2333.07,984.25 ccw(c2293.7,984.25) 2293.7,1023.62 0,1023.62 ccw(c0,984.25) -39.37,984.25

## Design rules (kind name [scope] priority, off if disabled: settings)
Clearance Clearance_INPOLY_U1 [InPolygon vs WithinRoom('u1')] p1: gap=3 ignorepadtopadclearanceinfootprint=FALSE except(0: Arc-Hole Track-Hole SMDPad-Hole THPad-Hole Via-Hole Fill-Hole Poly-Hole Region-Hole Text-Hole)
Clearance Clearance_inpoly_T_B [InPolygon vs OnTopLayer Or OnBottomLayer] p2: gap=10 ignorepadtopadclearanceinfootprint=FALSE except(0: Arc-Hole Track-Hole SMDPad-Hole THPad-Hole Via-Hole Fill-Hole Poly-Hole Region-Hole Text-Hole)
Clearance Clearance_INPOLY [InPolygon] p3: gap=4 ignorepadtopadclearanceinfootprint=FALSE except(0: Arc-Hole Track-Hole SMDPad-Hole THPad-Hole Via-Hole Fill-Hole Poly-Hole Region-Hole Text-Hole)
Clearance Clearance_room [WithinRoom('u10')] p4: gap=4 ignorepadtopadclearanceinfootprint=FALSE except(0: Arc-Hole Track-Hole SMDPad-Hole THPad-Hole Via-Hole Fill-Hole Poly-Hole Region-Hole Text-Hole)
Clearance Clearance_u1 [WithinRoom('u1')] p5: gap=3 ignorepadtopadclearanceinfootprint=FALSE except(0: Arc-Hole Track-Hole SMDPad-Hole THPad-Hole Via-Hole Fill-Hole Poly-Hole Region-Hole Text-Hole)
Clearance [All] p6: gap=5 ignorepadtopadclearanceinfootprint=TRUE except(0: Arc-Hole Track-Hole SMDPad-Hole THPad-Hole Via-Hole Fill-Hole Poly-Hole Region-Hole Text-Hole)
DiffPairsRouting DiffPairsRouting_CF90 [InDifferentialPairClass('CF90')] p1: maxlimit=5 minlimit=5 mostfreqgap=5 toplayer_minwidth=4.5 toplayer_maxwidth=4.5 toplayer_prefwidth=4.5 midlayer1_minwidth=4.49 midlayer1_maxwidth=15 midlayer1_prefwidth=15 midlayer2_minwidth=15 midlayer2_maxwidth=15 midlayer2_prefwidth=15 midlayer3_minwidth=15 midlayer3_maxwidth=15 midlayer3_prefwidth=15 midlayer4_minwidth=15 midlayer4_maxwidth=15 midlayer4_prefwidth=15 bottomlayer_minwidth=4.5 bottomlayer_maxwidth=4.5 bottomlayer_prefwidth=4.5 maxuncoupledlength=500
DiffPairsRouting [All] p2: maxlimit=7.3 minlimit=7 mostfreqgap=7 toplayer_minwidth=3.6 toplayer_maxwidth=4.2 toplayer_prefwidth=3.6 midlayer1_maxgap=7 midlayer1_minwidth=3.6 midlayer1_maxwidth=3.6 midlayer1_prefwidth=3.6 midlayer2_maxgap=7 midlayer2_minwidth=3.6 midlayer2_maxwidth=3.6 midlayer2_prefwidth=3.6 midlayer3_maxgap=7 midlayer3_minwidth=3.6 midlayer3_maxwidth=3.6 midlayer3_prefwidth=3.6 midlayer4_maxgap=7 midlayer4_minwidth=3.6 midlayer4_maxwidth=3.6 midlayer4_prefwidth=3.6 bottomlayer_minwidth=3.6 bottomlayer_maxwidth=4.2 bottomlayer_prefwidth=3.6 maxuncoupledlength=500
FanoutControl BGA [InComponent('U1') Or InComponent('U18') Or InComponent('U26')] p1: bgadir=Out bgaviamode=Centered fanoutstyle=BGA fanoutdirection=Alternating viagrid=1
FanoutControl Fanout_BGA [IsBGA] p2: bgadir=Out bgaviamode=Centered fanoutstyle=BGA fanoutdirection=Alternating viagrid=1 // Fanout_BGA (Default Rule)
FanoutControl Fanout_LCC [IsLCC] p3: bgadir=Out bgaviamode=Centered fanoutstyle=Auto fanoutdirection=Alternating viagrid=1 // Fanout_LCC (Default Rule)
FanoutControl Fanout_SOIC [IsSOIC] p4: bgadir=Out bgaviamode=Centered fanoutstyle=Auto fanoutdirection=Alternating viagrid=1 // Fanout_SOIC (Default Rule)
FanoutControl Fanout_Small [(CompPinCount < 5)] p5: bgadir=Out bgaviamode=Centered fanoutstyle=Auto fanoutdirection=OutThenIn viagrid=1 // Fanout_Small (Default Rule)
FanoutControl Fanout_Default [All] p6: bgadir=Out bgaviamode=Centered fanoutstyle=Auto fanoutdirection=Alternating viagrid=1 // Fanout_Default (Default Rule)
HoleSize [All] p1: absolutevalues=TRUE maxlimit=200 minlimit=1 maxpercent=80.000 minpercent=20.000
PlaneClearance PlaneClearance_v [isvia] p1: clearance=6
PlaneClearance [All] p2: clearance=12
PlaneConnect PlaneConnect_v [isvia] p1: planeconnectstyle=Direct reliefexpansion=20 reliefentries=4 reliefconductorwidth=10 reliefairgap=10
PlaneConnect [All] p2: planeconnectstyle=Relief reliefexpansion=15 reliefentries=4 reliefconductorwidth=15 reliefairgap=10
PolygonConnect PolygonConnect_v [isvia] p1: connectstyle=Direct reliefconductorwidth=10 reliefentries=4 polygonreliefangle="90 Angle" airgapwidth=10
PolygonConnect [All] p2: connectstyle=Direct reliefconductorwidth=10 reliefentries=4 polygonreliefangle="90 Angle" airgapwidth=10
RoomDefinition u10 [InComponentClass('Room Definition 2')] p1: confinementstyle=ConfineIn formatcopy=TRUE lockcomponents=FALSE outline 916.62,146.7 916.62,568.28 1338.2,568.28 1338.2,146.7
RoomDefinition u1 [InComponentClass('Room Definition 1')] p2: confinementstyle=ConfineIn formatcopy=TRUE lockcomponents=FALSE outline 1406.8,82.02 1406.8,603.4 1928.17,603.4 1928.17,82.02
RoutingVias [All] p1: holewidth=8 width=16 viastyle="Through Hole" minholewidth=8 minwidth=16 maxholewidth=8 maxwidth=16
SolderMaskExpansion [All] p1: expansion=4 istentingtop=FALSE
Width Width_u1 [WithinRoom('u1')] p1: maxlimit=20 minlimit=3.5 preferedwidth=3.5 toplayer_minwidth=4 toplayer_prefwidth=5 bottomlayer_prefwidth=5 minimp=50.000000 maximp=50.000000 favimp=50.000000
Width CF90 [InDifferentialPairClass('CF90')] p2: maxlimit=4.5 minlimit=4.5 preferedwidth=4.5
Width CF100 [InAnyDifferentialPair] p3: maxlimit=4.2 minlimit=3.6 preferedwidth=3.6 toplayer_minwidth=4.2 toplayer_prefwidth=4.2 midlayer1_maxwidth=3.6 midlayer2_maxwidth=3.6 midlayer3_maxwidth=3.6 midlayer4_maxwidth=3.6 bottomlayer_minwidth=4.2 bottomlayer_prefwidth=4.2 minimp=50.000000 maximp=50.000000 favimp=50.000000
Width POWER [InNetClass('POWER')] p4: maxlimit=100 minlimit=3.5 preferedwidth=15 toplayer_minwidth=8 bottomlayer_minwidth=6 minimp=50.000000 maximp=50.000000 favimp=50.000000
Width [All] p5: maxlimit=5 minlimit=3.5 preferedwidth=3.5 toplayer_prefwidth=5 midlayer1_maxwidth=3.5 midlayer2_maxwidth=3.5 midlayer3_maxwidth=3.5 midlayer4_maxwidth=3.5 bottomlayer_prefwidth=5 minimp=50.000000 maximp=50.000000 favimp=50.000000
21 further rules are at their usual default settings.

## Classes and differential pairs
net class DDR_D8-15: DDR_DM1 DDR_DQ8 DDR_DQ9 DDR_DQ10 DDR_DQ11 DDR_DQ12 DDR_DQ13 DDR_DQ14 DDR_DQ15 DDR_DQS1_N DDR_DQS1_P
net class DDR_D0-7: DDR_DM0 DDR_DQ0 DDR_DQ1 DDR_DQ2 DDR_DQ3 DDR_DQ4 DDR_DQ5 DDR_DQ6 DDR_DQ7 DDR_DQS0_N DDR_DQS0_P
net class DDR_A: DDR_A0 DDR_A1 DDR_A2 DDR_A3 DDR_A4 DDR_A5 DDR_A6 DDR_A7 DDR_A8 DDR_A9 DDR_A10 DDR_A11 DDR_A12 DDR_A13 DDR_A14 DDR_A15 DDR_BA0 DDR_BA1 DDR_BA2 DDR_C\A\S\ DDR_C\S\ DDR_CK_N DDR_CK_P DDR_CKE DDR_ODT DDR_R\A\S\ DDR_RST DDR_W\E\
net class FX3_CTL: A0 A1 CTL1 CTL4 CTL5 CTL6 CTL7
component class "Room Definition 2": U10
component class "Room Definition 1": U1
net class UD: PCLK UD0 UD1 UD2 UD3 UD4 UD5 UD6 UD7 UD8 UD9 UD10 UD11 UD12 UD13 UD14 UD15 UD16 UD17 UD18 UD19 UD20 UD21 UD22 UD23 UD24 UD25 UD26 UD27 UD28 UD29 UD30 UD31
net class MIPI: MIPI_D1_N MIPI_D1_P MIPI_D2_N MIPI_D2_P MIPI_D3_N MIPI_D3_P MIPI_D4_N MIPI_D4_P MIPI_DCK_A_N MIPI_DCK_A_P
differential pair class MIPI: MIPI_D1 MIPI_D2 MIPI_D3 MIPI_D4 MIPI_DCK_A
net class POWER: GND NetC93_1 NetC98_1 NetP1_A4 NetPAD1_1 NetPAD2_1 USBType-C-SHELL VBATT VCC1V0 VCC1V0A_PLL VCC1V0A_USB VCC1V2 VCC1V2_BL VCC1V2_BR VCC1V2_MIPI_RX VCC1V2_MIPI_TX VCC1V2_TR VCC1V5 VCC1V8 VCC2V5 VCC3V3 VCC3V3IOUSB VCC5V VCCFX3 VDD_DDR_VREF VDDA VDDD
differential pair class CF90: aa D RX1 RX2 SSRX SSTX TX1 TX2
component class T35_8_CONNECTORS: P3 P4 P5 P6 P7 PAD1 PAD2 PAD3 PAD4 R86 R87 R89 R90 R91 R92 R93 R94 R95 R96 R97 R101 R102 R103 R104 U20 U21 U22 U23 U24 U25 U26
component class T35_7_MEMORY: C157 C158 R84 R88 SJ1 U18 U19
component class T35_1_IO: C1 C2 C3 C4 LED1 LED2 LED3 R1 R2 R98 R99 R100 T2 T3 T4 T5 T6 U2 U3
component class T35_2_POWER_CONFIG: C5 C6 C7 C8 C9 C10 C11 C12 C13 C14 C15 C16 C17 C18 C19 C20 C21 C22 C23 C24 C25 C26 C27 C28 C30 C31 C33 C34 C35 C36 C37 C38 C39 C40 C41 C42 C43 C44 C45 C46 C47 C48 C49 C50 C51 C52 C53 C54 C55 C56 C57 C58 C59 C60 C61 C62 C63 C64 C65 C66 FB1 FB2 FB3 FB4 FB5 R3 R4 R5 R6 R7 R8 R9 R10 R11 R12 R13 R14 R15 R16 R17 R18 R19 R20 R21 R22 R23 T8 U1 U4 U5
component class T35_3_POWERSUPPLY: C29 C32 C67 C68 C69 C70 C71 C72 C73 C74 C75 C76 C77 C78 C79 C80 C81 C82 C83 C84 C85 C86 C87 C88 C89 C90 C91 C92 C93 C94 C95 C96 C97 C98 C99 C100 C101 C102 C103 C104 C105 C106 C107 L1 L2 L3 L4 L5 R24 R25 R26 R27 R28 R29 R30 R31 R32 R33 R34 R35 R36 R37 R38 R39 R40 R41 R42 R43 R44 R45 R46 R47 R48 R49 R50 R51 R52 R53 R54 R55 R56 T1 T9 T10 T11 T12 T13 T14 T15 U6 U7 U8 U9
component class T35_4_FX3: C110 C111 C112 C113 C114 C115 C116 C117 C118 C119 C120 C121 C122 C123 C124 C125 C126 C127 C128 C129 C130 C131 C132 C133 C134 C135 C136 C137 C159 CRY1 ECP1 FB6 FB7 FB8 FB9 P1 P8 R57 R58 R59 R60 R61 R62 R64 R65 R66 R67 R68 R69 R70 R71 R72 R74 R75 R76 R77 SJ2 T16 T17 T18 T19 T20 T21 U10 U11 U12 U13 U14 U15 U16 U27 U28 U29 U30
component class T35_5_MIPI: P2 T22 T23 T24 T25 T26 T27 T28 T29 T30 T31 T32 T33 T34 T35 T36
component class T35_6_DDR3: C138 C139 C140 C141 C142 C143 C144 C145 C146 C147 C148 C149 C150 C151 C152 C153 C154 C155 C156 R78 R79 R80 R81 R82 R83 U17
differential pair TX2: +TX2_P -TX2_N
differential pair TX1: +TX1_P -TX1_N
differential pair RX2: +RX2_P -RX2_N
differential pair RX1: +RX1_P -RX1_N
differential pair aa: +aa_P -aa_N
differential pair DDR_CK: +DDR_CK_P -DDR_CK_N
differential pair DDR_DQS0: +DDR_DQS0_P -DDR_DQS0_N
differential pair DDR_DQS1: +DDR_DQS1_P -DDR_DQS1_N
differential pair D: +D_P -D_N
differential pair MIPI_D1: +MIPI_D1_P -MIPI_D1_N
differential pair MIPI_D2: +MIPI_D2_P -MIPI_D2_N
differential pair MIPI_D3: +MIPI_D3_P -MIPI_D3_N
differential pair MIPI_D4: +MIPI_D4_P -MIPI_D4_N
differential pair MIPI_DCK_A: +MIPI_DCK_A_P -MIPI_DCK_A_N
differential pair SSRX: +SSRX_P -SSRX_N
differential pair SSTX: +SSTX_P -SSTX_N

## Components (designator, comment, footprint, x,y, rotation, side; value= is the part's Value field where it differs from the comment)
C1 "22pF/6.3V" 0201CS 1339.07,162.6 r180 bottom value="22pF ±5% 50V"
C2 "100nF/10V" 0201CS 1279.73,162.6 r180 bottom value="0.1uF ±10% 16V"
C3 "22pF/6.3V" 0201CS 1014.35,162.6 r0 bottom value="22pF ±5% 50V"
C4 "100nF/10V" 0201CS 1073.69,162.6 r0 bottom value="0.1uF ±10% 16V"
C5 "2.2uF/6.3V" 0201CS 1585.07,290.3 r270 bottom
C6 "10nF/16V" 0201CS 1728,339.28 r180 bottom
C7 "100nF/10V" 0201CS 1737.61,257.3 r180 bottom
C8 "10nF/16V" 0201CS 1757,315.48 r90 bottom
C9 "100nF/10V" 0201CS 1604.4,339.28 r180 bottom
C10 "10nF/16V" 0201CS 1642,293.76 r0 bottom
C11 "100nF/10V" 0201CS 1636.83,413.43 r90 bottom
C12 "2.2uF/6.3V" 0201CS 1582.07,417.84 r270 bottom
C13 "10nF/16V" 0201CS 1612.66,265 r90 bottom
C14 "100nF/10V" 0201CS 1664,395 r90 bottom
C15 "10nF/16V" 0201CS 1715,415.84 r0 bottom
C16 "100nF/10V" 0201CS 1640,339.28 r0 bottom
C17 "10nF/16V" 0201CS 1710.61,286 r0 bottom
C18 "100nF/10V" 0201CS 1640,367.4 r0 bottom
C19 "2.2uF/6.3V" 0201CS 1761.21,108.76 r90 bottom
C20 "2.2uF/6.3V" 0201CS 1842.98,440.43 r180 bottom
C21 "10nF/16V" 0201CS 1885.77,565.91 r0 bottom
C22 "100nF/10V" 0201CS 1855.05,551.83 r180 bottom
C23 "2.2uF/6.3V" 0201CS 1845.58,467.61 r0 bottom
C24 "10nF/16V" 0201CS 1664,516.97 r90 bottom
C25 "100nF/10V" 0201CS 1815.39,467.02 r180 bottom
C26 "2.2uF/6.3V" 0201CS 1815,385 r0 bottom
C27 "10nF/16V" 0201CS 1842.98,495.61 r90 bottom
C28 "100nF/10V" 0201CS 1815.39,412.84 r0 bottom
C29 "1uF/6.3V" 0201CS 879.2,1000.18 r180 top
C30 "100nF/10V" 0201CS 1768.12,258 r90 bottom
C31 "100nF/10V" 0201CS 1946,26.09 r90 top value="0.1uF ±10% 16V"
C32 "10uF/6.3V" 0402CS 693.19,969 r0 top
C33 "100nF/10V" 0201CS 1540.08,386.98 r180 bottom
C34 "10nF/16V" 0201CS 1779,403.05 r90 bottom
C35 "100nF/10V" 0201CS 1768.61,372 r180 bottom
C36 "2.2uF/6.3V" 0201CS 1456.8,546.11 r135 bottom
C37 "10nF/16V" 0201CS 1456.8,468.2 r135 bottom
C38 "100nF/10V" 0201CS 1664,483.43 r270 bottom
C39 "100nF/10V" 0201CS 1612.66,543.8 r90 bottom
C40 "2.2uF/6.3V" 0201CS 1538.3,543.8 r180 bottom
C41 "10nF/16V" 0201CS 1530,472 r135 bottom
C42 "100nF/10V" 0201CS 1484.71,415.84 r270 bottom
C43 "100nF/10V" 0201CS 1609.66,441.43 r270 bottom
C44 "2.2uF/6.3V" 0201CS 1510.3,283.89 r90 bottom
C45 "100nF/10V" 0201CS 1640.25,236.71 r90 bottom
C46 "2.2uF/6.3V" 0201CS 1481,339.28 r180 bottom
C47 "100nF/10V" 0201CS 1459,135 r180 bottom
C48 "2.2uF/6.3V" 0201CS 1612.66,235.71 r270 bottom
C49 "100nF/10V" 0201CS 1484.71,211.12 r90 bottom
C50 "2.2uF/6.3V" 0201CS 1691.43,441.43 r270 bottom
C51 "10nF/16V" 0201CS 1762,167 r0 bottom
C52 "100nF/10V" 0201CS 1784.8,315.48 r90 bottom
C53 "2.2uF/6.3V" 0201CS 1789.6,108.76 r90 bottom
C54 "10nF/16V" 0201CS 1514,339.28 r0 bottom
C55 "100nF/10V" 0201CS 1664,160 r270 bottom
C56 "2.2uF/6.3V" 0201CS 1721,443 r0 bottom
C57 "10nF/16V" 0201CS 1842.98,341.74 r180 bottom
C58 "100nF/10V" 0201CS 1771,196.89 r180 bottom
C59 "2.2uF/6.3V" 0201CS 1842.98,211.12 r270 bottom
C60 "10nF/16V" 0201CS 1842.98,313.48 r180 bottom
C61 "2.2uF/6.3V" 0201CS 1841.98,136.35 r0 bottom
C62 "10nF/16V" 0201CS 1669,236.86 r90 bottom
C63 "100nF/10V" 0201CS 1846.98,109.2 r0 bottom
C64 "2.2uF/6.3V" 0201CS 1709.61,230 r0 bottom
C65 "10nF/16V" 0201CS 1820,35 r90 bottom
C66 "100nF/10V" 0201CS 1818,108.76 r90 bottom
C67 "4.7uF/6.3V" 0402CS 997.12,779.45 r180 top value="4.7uF ±10% 16V"
C68 "100nF/10V" 0201CS 1186.34,999.91 r270 bottom
C69 "22uF/10V" 0603CS 1185.86,846.21 r90 bottom
C70 "22uF/10V" 0603CS 1186.34,790.45 r270 bottom
C71 "10uF/6.3V" 0402CS 997.12,815.45 r180 top value="10uF ±10% 25V"
C72 "4.7uF/6.3V" 0402CS 1097.37,817.31 r0 bottom value="4.7uF ±10% 16V"
C73 "1uF/6.3V" 0201CS 972.91,748.15 r0 top value="1uF  ±10% 25V"
C74 "1nF/6.3V" 0201CS 1247.14,847.45 r0 bottom value="1nF,±10% 50V"
C75 "10nF/16V" 0201CS 1108,847.45 r180 bottom value="10nF,±10% 50V"
C76 "33nF/6.3V" 0201CS 1003.2,672.64 r90 top value="33nF,±10% 50V"
C77 "100nF/10V" 0201CS 1350.85,954 r180 bottom
C78 "22uF/6.3V" 0603CS 1330,991.92 r0 bottom
C79 "33nF/6.3V" 0201CS 1386.61,689.45 r180 top value="33nF,±10% 50V"
C80 "100nF/10V" 0201CS 1247.14,875.32 r0 bottom
C81 "68pF/6.3V" 0201CS 1322.85,926.57 r0 bottom value="68pF,±10% 16V"
C82 "4.7nF/6.3V" 0201CS 1381.78,936.06 r90 top value="4.7nF,±10% 16V"
C83 "22pF/6.3V" 0201CS 1353.61,936.06 r90 top value="22pF,±5% 50V"
C84 "4.7nF/6.3V" 0201CS 975.61,932.45 r90 top value="4.7nF,±10% 16V"
C85 "100nF/10V" 0201CS 1021.48,954 r0 bottom
C86 "22uF/6.3V" 0603CS 1041.97,991.43 r180 bottom
C87 "22pF/6.3V" 0201CS 1000.61,874 r180 top value="22pF,±10% 16V"
C88 "100nF/10V" 0201CS 1108,875.32 r180 bottom
C89 "68pF/6.3V" 0201CS 1049.48,926.57 r180 bottom value="68pF,±10% 16V"
C90 "4.7nF/6.3V" 0201CS 1085.81,618.15 r180 top value="4.7nF,±10% 16V"
C91 "22pF/6.3V" 0201CS 1028.81,648.15 r270 top value="22pF,±5% 50V"
C92 "4.7nF/6.3V" 0201CS 1269.61,618.15 r0 top value="4.7nF,±10% 16V"
C93 "100nF/10V" 0201CS 1108,772.55 r180 bottom
C94 "100nF/10V" 0201CS 1030.25,646.67 r0 bottom
C95 "22uF/6.3V" 0603CS 1133.04,608.4 r180 bottom
C96 "22pF/6.3V" 0201CS 1327.61,648.45 r270 top value="22pF,±10% 16V"
C97 "68pF/6.3V" 0201CS 1060,676.69 r90 bottom value="68pF,±10% 16V"
C98 "100nF/10V" 0201CS 1248,772.55 r0 bottom
C99 "100nF/10V" 0201CS 1342,646 r180 bottom
C100 "22uF/6.3V" 0603CS 1240.29,607.27 r0 bottom
C101 "68pF/6.3V" 0201CS 1312,676.69 r90 bottom value="68pF,±10% 16V"
C102 "10nF/16V" 0201CS 819.71,780.02 r270 top
C103 "10pF/6.3V" 0201CS 740.81,782 r180 top
C104 "100nF/10V" 0201CS 369.08,884.57 r270 top value="0.1uF ±10% 16V"
C105 "10uF/6.3V" 0402CS 741.47,742.34 r270 top
C106 "10uF/6.3V" 0402CS 902.04,775.34 r270 top
C107 "18pF/6.3V" 0201CS 398.01,819.57 r180 top value="18pF ±5% 50V"
C110 "4.7uF/6.3V" 0402CS 301.44,691.58 r90 bottom
C111 "100nF/10V" 0201CS 909,354.72 r180 top
C112 "100nF/10V" 0201CS 473.96,433.44 r180 bottom
C113 "100nF/10V" 0201CS 909,327 r180 top
C114 "470pF/2KV" 1206CS 195.5,150.54 r90 bottom
C115 "100nF/10V" 0201CS 521,294 r180 bottom
C116 "33pF/6.3V" 0402CS 492,326.24 r0 bottom
C117 "100nF/10V" 0201CS 807,53.72 r90 bottom
C118 "18pF/6.3V" 0201CS 783,441.43 r270 top
C119 "100nF/10V" 0201CS 1309.15,95.72 r90 bottom value="0.1uF ±10% 16V"
C120 "100nF/10V" 0201CS 2169.93,242.27 r0 top
C121 "18pF/6.3V" 0201CS 846.2,480.2 r270 top
C122 "4.7uF/6.3V" 0402CS 979.97,373 r180 bottom
C123 "100nF/10V" 0201CS 881.17,408.66 r0 top
C124 "22uF/6.3V" 0603CS 836.5,221 r0 top
C125 "100nF/10V" 0201CS 875.72,258.75 r0 top
C126 "4.7uF/6.3V" 0402CS 1067,373 r180 bottom
C127 "100nF/10V" 0201CS 1070,341.28 r180 bottom
C128 "100nF/10V" 0201CS 955,162.6 r0 bottom
C129 "100nF/10V" 0201CS 1161.04,162.6 r180 bottom
C130 "100nF/10V" 0201CS 1080,222 r90 bottom
C131 "100nF/10V" 0201CS 1170,522 r0 bottom
C132 "22uF/6.3V" 0603CS 1276,372 r180 bottom
C133 "22uF/6.3V" 0603CS 1218.35,562.94 r180 bottom
C134 "100nF/10V" 0201CS 1311.07,334 r270 bottom
C135 "100nF/10V" 0201CS 1192.38,162.6 r0 bottom
C136 "100nF/10V" 0201CS 1000.2,229.17 r45 bottom
C137 "100nF/10V" 0201CS 973.44,528.4 r270 bottom
C138 "100nF/10V" 0201CS 1881,906.45 r180 bottom
C139 "100nF/10V" 0201CS 1660.05,673.91 r0 bottom
C140 "100nF/10V" 0201CS 1723,857 r180 bottom
C141 "100nF/10V" 0201CS 1942,906.45 r180 bottom
C142 "1uF/6.3V" 0201CS 1661,906.45 r0 bottom
C143 "1uF/6.3V" 0201CS 1502.17,906.45 r180 bottom
C144 "1uF/6.3V" 0201CS 1815.39,666 r180 bottom
C145 "1uF/6.3V" 0201CS 1877.98,666 r0 bottom
C146 "47uF/6.3V" 0603CS 1535.82,957 r180 bottom
C147 "47uF/6.3V" 0603CS 1847,958.77 r0 bottom
C148 "10nF/6.3V" 0201CS 1865,855 r0 bottom
C149 "10nF/6.3V" 0201CS 1789,906.45 r0 bottom
C150 "10nF/6.3V" 0201CS 1945.27,688.71 r270 bottom
C151 "10nF/6.3V" 0201CS 1565,906.45 r180 bottom
C152 "10nF/6.3V" 0201CS 1722,722 r0 bottom
C153 "10nF/6.3V" 0201CS 1476,663 r180 bottom
C154 "100nF/10V" 0201CS 1697,956 r180 bottom
C155 "100nF/10V" 0201CS 1573.9,682.91 r270 bottom
C156 "100nF/10V" 0201CS 1726,906.45 r0 bottom
C157 "100nF/10V" 0201CS 2130.56,26.09 r90 top value="0.1uF ±10% 16V"
C158 "100nF/10V" 0201CS 2018,242 r0 top
C159 "100nF/10V" 0201CS 596.06,702.94 r270 bottom
CRY1 "19.2MHZ无源晶振" XTAL_SMD_SMALL 814,451 r270 bottom locked
ECP1 "47uF10V" CASE-B 408,717.45 r180 bottom locked
FB1 "FB 600Ω@100MHz" FB0603 2025.6,790.9 r0 bottom
FB2 "FB 600Ω@100MHz" FB0603 1903.4,790.4 r180 bottom
FB3 "FB 600Ω@100MHz" FB0603 1621.22,790.9 r0 bottom
FB4 "FB 600Ω@100MHz" FB0603 1497.79,790.4 r180 bottom
FB5 "FB 600Ω@100MHz" FB0603 1766.71,790.4 r180 bottom
FB6 "FB*" FB0603 104,227.34 r180 top value=BLM18SG331TN1
FB7 "FB 1.8KΩ@100MHz" FB0603 836.02,591.36 r0 top
FB8 "FB 1.8KΩ@100MHz" FB0603 863,279 r0 bottom
FB9 "FB 1.8KΩ@100MHz" FB0603 761,302 r90 bottom
L1 "2.2uH/1.5A" 201610 1261.64,956 r90 bottom
L2 "2.2uH/1.5A" 201610 1110.64,958 r90 bottom locked
L3 "2.2uH/1.5A" 201610 1116.64,688 r270 bottom locked
L4 "2.2uH/1.5A" 201610 1255.64,688 r270 bottom locked
L5 "0.47uH" 201610 799,819.57 r270 bottom
LED1 "LED_R" 0402LED 3.4,228.35 r180 top
LED2 "LED_G" 0402LED 3.4,190.41 r180 top
LED3 "LED_B" 0402LED 3.4,152.46 r180 top
P1 "USB3.0_Type-C" "CONN_105450-0101_MOL - ENFORCE" 121.8,511.81 r90 bottom locked
P2 "39Pin_MIPI_Connector" 39PIN_0.3错位排序 2101.46,511.81 r180 top locked
P3 "1.25mm5Pin" CC125-5 242.36,48.74 r0 bottom locked
P4 "GuiderPort" RJ11-SMD -93.43,511.81 r270 top locked
P5 "1.25mm5Pin" CC125-5 441.85,973 r180 bottom locked
P6 "1.25mm4Pin" CON_530470410_MOL 710.64,48.5 r0 bottom locked
P7 "JTAG-1.25mm2*4" MHDR2X4 2020.4,916.8 r0 top locked
P8 "M543-1" M543-1 132,817.31 r180 top locked
PAD1 "PAD" M2-R4-NC 98.43,940.94 r0 top locked
PAD2 "PAD" M2-R4-NC 98.43,82.68 r0 top locked
PAD3 "PAD" M1.6-R3.2-NC 2263.78,925.2 r90 top locked
PAD4 "PAD" M1.6-R3.2-NC 2263.78,98.43 r90 top locked
R1 "33Ω" 0402RS 1444.35,78.56 r0 top value="33Ω ±1%"
R2 "33Ω" 0402RS 1216,88 r90 top value="33Ω ±1%"
R3 "10K" 0201RS 1523.02,29.67 r0 bottom
R4 "324K" 0402RS 1576.4,35.11 r90 top
R5 "10K" 0201RS 1789.46,47.77 r270 bottom
R6 "10K" 0201RS 1451,58.7 r0 bottom
R7 "10K" 0201RS 2093.46,40.05 r270 top
R8 "10K" 0201RS 1675,195.56 r315 bottom
R9 "10K" 0201RS 1832.74,48.68 r270 top
R10 "10K" 0201RS 1977.94,334.65 r90 top
R11 "10K*" 0201RS 1977.94,276.19 r270 top
R12 "10K" 0201RS 1640.36,48.68 r90 top
R13 "10K*" 0201RS 1762.99,48.68 r90 top
R14 "10K*" 0201RS 1701.68,48.68 r90 top
R15 "10K" 0201RS 2002.37,854.88 r90 top
R16 "10K" 0201RS 2132,854.88 r90 top
R17 "10K" 0201RS 2045.58,854.88 r90 top
R18 "10K" 0201RS 2088.79,854.88 r90 top
R19 "10K*" 0201RS 1949.85,334.65 r90 top
R20 "10K" 0201RS 1735.33,48.68 r90 top
R21 "10K" 0201RS 1949.85,276.19 r270 top
R22 "10K" 0201RS 1674.02,48.68 r90 top
R23 "10K*" 0201RS 1612.71,48.68 r90 top
R24 "44.2K" 0201RS 1368.8,771.15 r180 top value=330K,±1%
R25 "10K" 0201RS 1368.8,744.15 r180 top value=10K,±1%
R26 "10K" 0201RS 1367,994 r180 top value=10K,±1%
R27 "0Ω" 0201RS 1368.61,825.45 r0 top value=0Ω,±1%
R28 "10K" 0201RS 991.91,990.45 r0 top value=10K,±1%
R29 "0Ω" 0201RS 1368.61,852.45 r0 top value=0Ω,±1%
R30 "10K" 0201RS 1073.94,590.58 r0 top value=10K,±1%
R31 "10K" 0201RS 1368.61,798.45 r0 top value=10K,±1%
R32 "10K" 0201RS 1279.73,590.64 r180 top value=10K,±1%
R33 "22K" 0201RS 1369.61,717.45 r0 top value=10K,±1%
R34 "4.99K" 0201RS 1333.85,899.57 r180 bottom value=1.24K,±1%
R35 "15.4K" 0201RS 1369,891 r0 top value=15.4K,±1%
R36 "10K" 0201RS 1381,941 r90 bottom value=10K,±1%
R37 "15.4K" 0201RS 1004.91,945.45 r90 top value=15.4K,±1%
R38 "8.66K" 0201RS 1038.48,899.57 r0 bottom value=19.1K,±1%
R39 "15.4K" 0201RS 1071.81,646.15 r0 top value=15.4K,±1%
R40 "10K" 0201RS 992,940.94 r90 bottom value=10K,±1%
R41 "15.4K" 0201RS 1283.61,646.78 r180 top value=15.4K,±1%
R42 "12.4K" 0201RS 1031.48,687.72 r270 bottom value=53.6K,±1%
R43 "10K" 0201RS 989.91,846.45 r0 top value=10K,±1%
R44 "10K" 0201RS 1046.29,733.89 r180 bottom value=10K,±1%
R45 "30.9K" 0201RS 1339.6,687.45 r270 bottom value=8.66K,±1%
R46 "10K" 0201RS 1324.72,734.29 r0 bottom value=10K,±1%
R47 "100K" 0201RS 595.95,894.97 r0 top value=100K，±1%
R48 "100K" 0201RS 595.95,858.27 r0 top value=100K，±1%
R49 "100K" 0201RS 595.95,821.57 r0 top value=100K，±1%
R50 "10K" 0201RS 628,960 r270 top value=10K,±1%
R51 "10K" 0201RS 783.75,1000.18 r0 top value=10K,±1%
R52 "0*" 0201RS 399.52,873.57 r270 top value=0Ω，±5%
R53 "10K" 0201RS 678,904 r180 bottom value=10K,±1%
R54 "20K" 0201RS 759.14,817.31 r0 top value=10K,±1%
R55 "91K" 0201RS 643,837 r90 top value=330K,±1%
R56 "30K" 0201RS 705,817.31 r0 top value=10K,±1%
R57 "0*" 0201RS 999.62,470.73 r0 bottom
R58 "1M" 0603RS 73,176.34 r0 top
R59 "1.5K" 0402RS 1076.99,439 r135 bottom
R60 "1.5K" 0402RS 1020.25,527.75 r315 bottom
R61 "200 1%" 0402RS 958.05,238.91 r270 bottom
R62 "6.04K 1%" 0402RS 1013,439.25 r180 bottom
R64 "5.1K" 0201RS 373.45,422.44 r180 bottom value=5.1K，±1%
R65 "5.1K" 0201RS 373.45,394.88 r180 bottom value=5.1K，±1%
R66 "10Ω" 0402RS 463,364.66 r0 bottom value=10Ω，±1%
R67 "10K" 0201RS 459,308 r90 bottom value=10K，±1%
R68 "1.5K*" 0402RS 845.57,90 r270 bottom value="1.5K ±1%"
R69 "1.5K" 0402RS 1143,341.28 r180 bottom
R70 "200K" 0201RS 1027,101 r180 bottom value="200K ±1%"
R71 "1.5K" 0402RS 2111.29,163.07 r0 bottom value="1.5K ±1%"
R72 "1.5K" 0402RS 2111.29,198 r0 bottom value="1.5K ±1%"
R74 "1MΩ*" 0402RS 892.78,403.85 r90 bottom
R75 "1K 1%" 0402RS 2148.37,117.64 r0 top
R76 "0*" 0402RS 797,649 r0 top
R77 "0*" 0402RS 778.42,707.24 r90 top
R78 "80.6Ω 1%" 0402RS 1634.21,742.81 r0 bottom
R79 "1K 1%" 0402RS 1630,956 r180 bottom
R80 "1K 1%" 0402RS 1784,957 r180 bottom
R81 "4.7K" 0402RS 1440.37,870.2 r90 bottom
R82 "240 1%" 0201RS 1652.71,712 r0 bottom
R83 "240 1%" 0201RS 1574,466 r0 bottom
R84 "10K" 0201RS 1804.74,48.68 r270 top
R86 "0*" 0402RS 2192,832 r90 top
R87 "0*" 0402RS 2183.66,80.79 r270 top
R88 "1K 1%" 0402RS 1997.44,117.37 r0 top
R89 "100" 0402RS 663,243.15 r0 top
R90 "100" 0402RS 663,209.48 r0 top
R91 "100" 0402RS 663,175.81 r0 top
R92 "100" 0402RS 663,142.15 r0 top
R93 "10K" 0201RS 1118,586.86 r270 top
R94 "100" 0402RS 243.21,908.21 r180 top
R95 "100" 0402RS 850.56,1000.18 r0 bottom
R96 "0*" 0402RS 195.5,993.77 r270 top
R97 "0*" 0402RS 195.5,35.11 r90 top
R98 "300" 0201RS 500.31,127.29 r180 top value=10K,±1%
R99 "100" 0201RS 500.07,100 r180 top value=10K,±1%
R100 "100" 0201RS 500.11,73 r180 top value=10K,±1%
R101 "10K" 0201RS 390,112 r90 top
R102 "10K" 0201RS 340.79,112 r90 top
R103 "10K" 0201RS 291.57,112 r90 top
R104 "10K" 0201RS 242.36,112 r90 top
SJ1 "SolderableJumper*" SJ 1950,117.02 r0 top
SJ2 "SolderableJumper*" SJ 2102.35,117.16 r0 top
T1 "" TP-S 333,901 r0 top value=测试点
T2 "" TP-S 1737,48.72 r180 bottom value=测试点
T3 "" TP-S 1694.58,48.72 r180 bottom value=测试点
T4 "" TP-S 1652.17,48.72 r180 bottom value=测试点
T5 "" TP-S 1609.75,48.72 r180 bottom value=测试点
T6 "" TP-S 1881.36,403.05 r180 bottom value=测试点
T8 "" TP-S 1472.83,33.75 r0 top
T9 "" TP-S 968,711 r0 top value=测试点
T10 "" TP-S 1231.61,997.38 r90 top value=测试点
T11 "" TP-S 1140.35,997.38 r90 top value=测试点
T12 "" TP-S 1151.15,632.53 r90 top value=测试点
T13 "" TP-S 1204.38,632.53 r90 top value=测试点
T14 "" TP-S 701.41,746.74 r0 top value=测试点
T15 "" TP-S 858.56,746.74 r90 top value=测试点
T16 "" TP-S 1080,287.89 r270 bottom
T17 "" TP-S 1062,193.21 r270 bottom
T18 "" TP-S 1050.29,232.17 r90 bottom
T19 "" TP-S 1110.17,375.86 r90 bottom
T20 "" TP-S 1110.64,481.61 r90 bottom
T21 "" TP-S 947.56,578.38 r90 top
T22 "" TP-S 2154.8,562 r270 bottom
T23 "" TP-S 2092.4,440.96 r270 bottom
T24 "" TP-S 2037,513.92 r270 bottom
T25 "" TP-S 2154.8,432.66 r270 bottom
T26 "" TP-S 2223,540 r270 bottom
T27 "" TP-S 2037,440.96 r270 bottom
T28 "" TP-S 2092.4,513.92 r270 bottom
T29 "" TP-S 2221,423 r270 bottom
T30 "" TP-S 2154.8,518.89 r270 bottom
T31 "" TP-S 2037,368 r270 bottom
T32 "" TP-S 2155,475 r270 bottom
T33 "" TP-S 2154.8,389.55 r270 bottom
T34 "" TP-S 2221,501 r270 bottom
T35 "" TP-S 2092.4,368 r270 bottom
T36 "" TP-S 2222,463 r270 bottom
U1 "T35F324" T35-F324-BGA100P9X9-81A 1663.84,339.07 r270 top locked
U2 "50MHz" XTAL_SMD_SMALL 1331.79,87 r0 top value=SIT8008BI-21-18N-72.000000
U3 "100MHz" XTAL_SMD_SMALL 1104,88.72 r0 top locked value=SIT8008BI-21-18N-72.000000
U4 "MAX809TTRG" MAX809 939.14,73.23 r0 top
U5 "GD25Q32EEIGR" SON127P600-8N-USON8 2120.75,49.34 r0 bottom
U6 "TPS65400RGZT" QFN50P700X700X100-49N_TPS65400RGZT(PRIMARY) 1176.85,818.24 r270 top locked
U7 "TPS628501DRLR" SOT583 716.81,890.09 r0 top
U8 "TPS79325DBVR" SOT-23-5 895.78,940.9 r270 top
U9 "LM3880MF-1AA" SOT-23-6 450.27,897.57 r0 top
U10 "CYUSB3014-BZXI" CYUSB3014 969.93,200.01 r90 top locked
U11 "NCP361SNT1G" SOT-23-5 204.76,785.57 r0 bottom
U12 "TPD2EUSB30ADRTR-N" DRT0003A 847.38,523.12 r270 top
U13 "TLV3201AIDBVR" sot-23-5 300.51,276.61 r0 bottom
U14 "MAX809TTRG" MAX809 806,70.47 r0 top
U15 "UM3212M8" MSOP8 1264.77,121.29 r180 bottom value=UM3212MB
U16 "BL24C64A-NTRC" UDFN-8LL 2138.61,181.83 r0 top
U17 "MT41K256M16TW-107:P" MICT-TNA-96 1696.25,793.01 r270 top locked
U18 "BL24CM1A-NTRC" UDFN-8LL 1986.31,181.56 r0 top
U19 "GD25Q32EEIGR" SON127P600-8N-USON8 1934.19,49.95 r0 bottom
U20 "IS281GB" TLP281-1 705.14,361.3 r90 bottom
U21 "RCLAMP0524" RCLAMP0524 748.51,193.21 r0 top
U22 "IS281GB" TLP281-1 603.12,361.3 r90 bottom locked
U23 "IS281GB" TLP281-1 596,225 r180 bottom locked
U24 "IS281GB" TLP281-1 555.22,172.86 r180 top locked
U25 "IS281GB" TLP281-1 635.71,855.04 r180 bottom
U26 "IS281GB" TLP281-1 784.94,995.14 r180 bottom locked
U27 "CBTL02043ABQ" VQFN-20 435.84,547.13 r180 bottom value=HD3SS3212RKSR
U28 "RCLAMP0524" RCLAMP0524 319,493.63 r180 bottom locked
U29 "RCLAMP0524" RCLAMP0524 319,600 r180 bottom locked
U30 "TPD2EUSB30ADRTR-N" DRT0003A 302.27,408.66 r90 bottom

## Footprints (in the part's own frame and the unit in brackets; to place one, negate y for a bottom-side part, rotate by r counter-clockwise, add the part's x,y. Pads: shape width x height; smd on the part's side, far side on the other; paste and mask are expansions set on the pad)
39PIN_0.3错位排序 [mm]
  rect 1.1x0.3 smd: 1(-1.512,5.7)
  oval 1.1x0.3 smd: 2(1.512,5.4) 3(-1.512,5.1) 4(1.512,4.8) 5(-1.512,4.5) 6(1.512,4.2) 7(-1.512,3.9) 8(1.512,3.6) 9(-1.512,3.3) 10(1.512,3) 11(-1.512,2.7) 12(1.512,2.4) 13(-1.512,2.1) 14(1.512,1.8) 15(-1.512,1.5) 16(1.512,1.2) 17(-1.512,0.9) 18(1.512,0.6) 19(-1.512,0.3) 20(1.512,0) 21(-1.512,-0.3) 22(1.512,-0.6) 23(-1.512,-0.9) 24(1.512,-1.2) 25(-1.512,-1.5) 26(1.512,-1.8) 27(-1.512,-2.1) 28(1.512,-2.4) 29(-1.512,-2.7) 30(1.512,-3) 31(-1.512,-3.3) 32(1.512,-3.6) 33(-1.512,-3.9) 34(1.512,-4.2) 35(-1.512,-4.5) 36(1.512,-4.8) 37(-1.512,-5.1) 38(1.512,-5.4) 39(-1.512,-5.7)
  silkscreen extent -0.62,-6.5 0.62,6.2, body extent -1.69,-6.76 1.81,6.74, height 0.9
0201CS [mm]
  rect 0.4x0.3 smd: 1(0.075,0) 2(0.636,0)
  silkscreen extent -0.27,-0.3 0.98,0.3, body extent 0.06,-0.15 0.66,0.15, height 0.29
0201RS [mm] "Chip Resistor, 2-Leads, Body 0.60x0.30mm, IPC Medium Density"
  rect 0.45x0.35 smd mask+0.051: 1(-0.3,0) 2(0.3,0)
  silkscreen extent -0.64,-0.3 0.64,0.3, body extent -0.31,-0.16 0.32,0.16, height 0.26
0402CS [mil]
  rect 25x20 smd: 1(0,0) 2(35,0)
  silkscreen extent -18,-16 54,16, body extent -3,-10 37,10, height 20
0402LED [mil]
  rect 23.5x28 smd paste+0 mask+0: 1(-18.75,0) 2(18.75,0)
  silkscreen extent -66,-17 33,17, body extent -19,-10 19,10, height 14
0402RS [mil]
  rect 25x20 smd: 1(0,0) 2(35,0)
  silkscreen extent -18,-16 52,16, body extent -2,-10 38,10, height 15
0603CS [mm]
  rect 0.965x0.8 smd: 1(0,0) 2(1.575,0)
  silkscreen extent -0.64,-0.55 2.2,0.56, body extent -0.01,-0.4 1.59,0.4, height 0.6
0603RS [mm]
  rect 0.965x0.8 smd: 1(0,0) 2(1.575,0)
  silkscreen extent -0.65,-0.58 2.24,0.59, body extent -0.01,-0.4 1.59,0.4, height 0.38
1206CS [mil]
  rect 60x60 smd: 1(0,0) 2(135,0)
  silkscreen extent -41,-41 177,42, body extent 5,-31 131,32, height 39
201610 [mm] "MHCD201610B-2R2M-A8L"
  rect 0.8x1.8 smd: 1(-0.9,0) 2(0.9,0)
  silkscreen extent -1.4,-1.02 1.4,1.02, body extent -1.14,-0.89 1.14,0.89, height 1
CASE-B [mil]
  rect 60x100 smd: 1(-10,0) 2(-125,0)
  silkscreen extent -165,-93 30,60, body extent -134,-54 3,56, height 75
CC125-5 [mm] "CC125-5"
  oval 1x1.5 hole 0.65: 1(0,0) 2(1.25,0) 3(2.5,0) 4(3.75,0) 5(5,0)
  silkscreen extent -2.03,-2.06 6.5,1.17, body extent -1.51,-2.03 6.49,1.17, height 4.6
CON_530470410_MOL [mm]
  oval 1x1.5 hole 0.65: 1(0,0) 2(-1.25,0) 3(-2.5,0) 4(-3.75,0)
  silkscreen extent -5.25,-2.05 2.29,1.15, body extent -5.28,-2.11 1.47,1.09, height 4.28
"CONN_105450-0101_MOL - ENFORCE" [mm]
  rect 0.3x1.2 smd paste+0 mask+0: A1(-2.62,2.712) A8(0.88,2.712) A9(1.38,2.712) A12(2.88,2.712)
  rect 0.3x0.95 smd paste+0 mask+0: A2(-2.12,2.588) A3(-1.62,2.588) A4(-1.12,2.588) A5(-0.62,2.588) A6(-0.12,2.588) A7(0.38,2.588) A10(1.88,2.588) A11(2.38,2.588) B1(2.63,1.288) B2(2.13,1.288) B3(1.63,1.288) B4(1.13,1.288) B5(0.63,1.288) B6(0.13,1.288) B7(-0.37,1.288) B8(-0.87,1.288) B9(-1.37,1.288) B10(-1.87,1.288) B11(-2.37,1.288) B12(-2.87,1.288)
  round 0.406 hole 0.203 mask+0: SH1(-5.512,-2.588) SH1(-5.22,-3.362) SH1(-5.22,-1.813) SH1(-5.029,-2.588) SH1(-3.658,-2.588) SH1(-3.467,-3.362) SH1(-3.467,-1.813) SH1(-3.175,-2.588) SH4(3.099,-2.588) SH4(3.391,-3.362) SH4(3.391,-1.813) SH4(3.581,-2.588) SH4(5.055,-2.591) SH4(5.245,-3.365) SH4(5.245,-1.816) SH4(5.537,-2.591)
  oval 3x2.5 / inner oval 1.1x2.5 / far side oval 3x2.5 hole 0.6 slot 1.9 at 90 deg: SH1(-4.32,-2.588)
  oval 1.1x2.1 hole 0.6 slot 1.6 at 90 deg: SH2(-4.32,1.963)
  oval 1.5x1.1 hole 0.6 slot 1.2 at 0 deg: SH2(-4.02,1.462) SH3(4.02,1.462)
  round 2.1 / inner oval 1.1x2.1 / far side round 2.1 hole 0.6 slot 1.6 at 90 deg: SH3(4.32,1.963)
  oval 3x2.5 / inner oval 1.1x2.5 / far side oval 3x2.5 hole 0.6 slot 1.9 at 90 deg mask+0: SH4(4.32,-2.588)
  round 0.5 hole 0.5 mask+0: ""(-3.4,0.613) ""(3.4,0.613)
  silkscreen extent -4.32,-5.21 4.32,3.22, body extent -4.47,-5.29 4.47,2.81, height 3.2
CYUSB3014 [mm]
  round 0.4 smd: A1(0,0) A2(0.8,0) A3(1.6,0) A4(2.4,0) A5(3.2,0) A6(4,0) A7(4.8,0) A8(5.6,0) A9(6.4,0) A10(7.2,0) A11(8,0) B1(0,-0.8) B2(0.8,-0.8) B3(1.6,-0.8) B4(2.4,-0.8) B5(3.2,-0.8) B6(4,-0.8) B7(4.8,-0.8) B8(5.6,-0.8) B9(6.4,-0.8) B10(7.2,-0.8) B11(8,-0.8) C1(0,-1.6) C2(0.8,-1.6) C3(1.6,-1.6) C4(2.4,-1.6) C5(3.2,-1.6) C6(4,-1.6) C7(4.8,-1.6) C8(5.6,-1.6) C9(6.4,-1.6) C10(7.2,-1.6) C11(8,-1.6) D1(0,-2.4) D2(0.8,-2.4) D3(1.6,-2.4) D4(2.4,-2.4) D5(3.2,-2.4) D6(4,-2.4) D7(4.8,-2.4) D8(5.6,-2.4) D9(6.4,-2.4) D10(7.2,-2.4) D11(8,-2.4) E1(0,-3.2) E2(0.8,-3.2) E3(1.6,-3.2) E4(2.4,-3.2) E5(3.2,-3.2) E6(4,-3.2) E7(4.8,-3.2) E8(5.6,-3.2) E9(6.4,-3.2) E10(7.2,-3.2) E11(8,-3.2) F1(0,-4) F2(0.8,-4) F3(1.6,-4) F4(2.4,-4) F5(3.2,-4) F6(4,-4) F7(4.8,-4) F8(5.6,-4) F9(6.4,-4) F10(7.2,-4) F11(8,-4) G1(0,-4.8) G2(0.8,-4.8) G3(1.6,-4.8) G4(2.4,-4.8) G5(3.2,-4.8) G6(4,-4.8) G7(4.8,-4.8) G8(5.6,-4.8) G9(6.4,-4.8) G10(7.2,-4.8) G11(8,-4.8) H1(0,-5.6) H2(0.8,-5.6) H3(1.6,-5.6) H4(2.4,-5.6) H5(3.2,-5.6) H6(4,-5.6) H7(4.8,-5.6) H8(5.6,-5.6) H9(6.4,-5.6) H10(7.2,-5.6) H11(8,-5.6) J1(0,-6.4) J2(0.8,-6.4) J3(1.6,-6.4) J4(2.4,-6.4) J5(3.2,-6.4) J6(4,-6.4) J7(4.8,-6.4) J8(5.6,-6.4) J9(6.4,-6.4) J10(7.2,-6.4) J11(8,-6.4) K1(0,-7.2) K2(0.8,-7.2) K3(1.6,-7.2) K4(2.4,-7.2) K5(3.2,-7.2) K6(4,-7.2) K7(4.8,-7.2) K8(5.6,-7.2) K9(6.4,-7.2) K10(7.2,-7.2) K11(8,-7.2) L1(0,-8) L2(0.8,-8) L3(1.6,-8) L4(2.4,-8) L5(3.2,-8) L6(4,-8) L7(4.8,-8) L8(5.6,-8) L9(6.4,-8) L10(7.2,-8) L11(8,-8)
  silkscreen extent -1,-9 9,1, body extent -1.01,-8.99 8.99,1.01, height 1.1
DRT0003A [mm]
  rect 0.3x0.45 smd paste+0 mask+0.051: 1(-0.35,-0.575) 2(0.35,-0.575) 3(0,0.575)
  silkscreen extent -0.67,0.05 0.67,0.58, body extent -0.5,-0.5 0.5,0.5, height 0.5
FB0603 [mm]
  rect 0.965x0.8 smd: 1(-0.787,0) 2(0.787,0)
  silkscreen extent -1.44,-0.58 1.45,0.59, body extent -0.8,-0.4 0.8,0.4, height 0.38
M1.6-R3.2-NC [mm]
  round 2.2 hole 1.8: 1(0,0)
  silkscreen extent -1.6,-1.6 1.6,1.6
M2-R4-NC [mm]
  round 2.2 hole 2.2: 1(0,0)
  silkscreen extent -2,-2 2,2
M543-1 [mm] "1.55*5.2（1A行程1.0）90度折弯针"
  round 1.3 hole 0.8: 0(0,0)
  rect 1x0.7 smd: 0(1.651,-0.5) 0(1.651,0.5)
  silkscreen extent -0.8,-1 3.7,1
MAX809 [mil]
  rect 36x36 smd: 1(-35.43,-35.43) 2(39.57,-35.43)
  rect 36x50 smd: 3(2.57,44.57)
  silkscreen extent -55,-40 60,50, body extent -56,-41 62,63, height 43
MHDR2X4 [mil]
  oct 40x40 hole 25: 1(0,0)
  round 40 hole 25: 2(0,50) 3(50,0) 4(50,50) 5(100,0) 6(100,50) 7(150,0) 8(150,50)
  silkscreen extent -25,-25 175,75, body extent -34,-33 184,85, height 170
MICT-TNA-96 [mm] "BGA, 96-Balls, Body 14x10mm, Pitch 0.8mm"
  round 0.4 smd: A1(-3.2,6) A2(-2.4,6) A3(-1.6,6) A7(1.6,6) A8(2.4,6) A9(3.2,6) B1(-3.2,5.2) B2(-2.4,5.2) B3(-1.6,5.2) B7(1.6,5.2) B8(2.4,5.2) B9(3.2,5.2) C1(-3.2,4.4) C2(-2.4,4.4) C3(-1.6,4.4) C7(1.6,4.4) C8(2.4,4.4) C9(3.2,4.4) D1(-3.2,3.6) D2(-2.4,3.6) D3(-1.6,3.6) D7(1.6,3.6) D8(2.4,3.6) D9(3.2,3.6) E1(-3.2,2.8) E2(-2.4,2.8) E3(-1.6,2.8) E7(1.6,2.8) E8(2.4,2.8) E9(3.2,2.8) F1(-3.2,2) F2(-2.4,2) F3(-1.6,2) F7(1.6,2) F8(2.4,2) F9(3.2,2) G1(-3.2,1.2) G2(-2.4,1.2) G3(-1.6,1.2) G7(1.6,1.2) G8(2.4,1.2) G9(3.2,1.2) H1(-3.2,0.4) H2(-2.4,0.4) H3(-1.6,0.4) H7(1.6,0.4) H8(2.4,0.4) H9(3.2,0.4) J1(-3.2,-0.4) J2(-2.4,-0.4) J3(-1.6,-0.4) J7(1.6,-0.4) J8(2.4,-0.4) J9(3.2,-0.4) K1(-3.2,-1.2) K2(-2.4,-1.2) K3(-1.6,-1.2) K7(1.6,-1.2) K8(2.4,-1.2) K9(3.2,-1.2) L1(-3.2,-2) L2(-2.4,-2) L3(-1.6,-2) L7(1.6,-2) L8(2.4,-2) L9(3.2,-2) M1(-3.2,-2.8) M2(-2.4,-2.8) M3(-1.6,-2.8) M7(1.6,-2.8) M8(2.4,-2.8) M9(3.2,-2.8) N1(-3.2,-3.6) N2(-2.4,-3.6) N3(-1.6,-3.6) N7(1.6,-3.6) N8(2.4,-3.6) N9(3.2,-3.6) P1(-3.2,-4.4) P2(-2.4,-4.4) P3(-1.6,-4.4) P7(1.6,-4.4) P8(2.4,-4.4) P9(3.2,-4.4) R1(-3.2,-5.2) R2(-2.4,-5.2) R3(-1.6,-5.2) R7(1.6,-5.2) R8(2.4,-5.2) R9(3.2,-5.2) T1(-3.2,-6) T2(-2.4,-6) T3(-1.6,-6) T7(1.6,-6) T8(2.4,-6) T9(3.2,-6)
  silkscreen extent -5,-7 5,7, body extent -5,-7 5,7, height 0.25
MSOP8 [mm]
  rect 1.3x0.4 smd: 1(0,0)
  oval 1.3x0.4 smd: 2(0,-0.65) 3(0,-1.3) 4(0,-1.95) 5(4.6,-1.95) 6(4.6,-1.3) 7(4.6,-0.65) 8(4.6,0)
  rect 1x1.5 smd: SS(2.235,-0.991)
  silkscreen extent 1.22,-2.31 3.38,0.33, body extent -0.24,-2.47 4.76,0.53, height 0.92
QFN50P700X700X100-49N_TPS65400RGZT(PRIMARY) [mm]
  rect 0.88x0.26 smd mask+0.025: 1(-3.435,2.75) 2(-3.435,2.25) 3(-3.435,1.75) 4(-3.435,1.25) 5(-3.435,0.75) 6(-3.435,0.25) 7(-3.435,-0.25) 8(-3.435,-0.75) 9(-3.435,-1.25) 10(-3.435,-1.75) 11(-3.435,-2.25) 25(3.435,-2.75) 26(3.435,-2.25) 27(3.435,-1.75) 28(3.435,-1.25) 29(3.435,-0.75) 30(3.435,-0.25) 31(3.435,0.25) 32(3.435,0.75) 33(3.435,1.25) 34(3.435,1.75) 35(3.435,2.25)
  rect 0.78x0.26 smd mask+0.025: 12(-3.435,-2.75) 36(3.435,2.75)
  rect 0.26x0.88 smd mask+0.025: 13(-2.75,-3.435) 14(-2.25,-3.435) 15(-1.75,-3.435) 16(-1.25,-3.435) 17(-0.75,-3.435) 18(-0.25,-3.435) 19(0.25,-3.435) 20(0.75,-3.435) 21(1.25,-3.435) 22(1.75,-3.435) 23(2.25,-3.435) 37(2.75,3.435) 38(2.25,3.435) 39(1.75,3.435) 40(1.25,3.435) 41(0.75,3.435) 42(0.25,3.435) 43(-0.25,3.435) 44(-0.75,3.435) 45(-1.25,3.435) 46(-1.75,3.435) 47(-2.25,3.435)
  rect 0.26x0.78 smd mask+0.025: 24(2.75,-3.435) 48(-2.75,3.435)
  rect 4.08x4.08 smd mask+0.025: EP(0,0)
  silkscreen extent -3.58,-3.58 3.58,3.58, body extent -3.5,-3.5 3.5,3.5, height 1
RCLAMP0524 [mm]
  rect 0.55x0.2 smd paste+0 mask+0.051: 1(-0.425,1) 2(-0.425,0.5) 3(-0.425,-0.5) 4(-0.425,-1) 5(0.425,-1) 6(0.425,-0.5) 7(0.425,0.5) 8(0.425,1)
  rect 0.55x0.4 smd paste+0 mask+0.051: 9(-0.425,0) 10(0.425,0)
  silkscreen extent -0.95,-1.32 0.55,1.32, body extent -0.5,-1.25 0.5,1.25, height 0.55
RJ11-SMD [mm]
  rect 3.8x2.8 smd: 0(7.2,7.88) ""(-7.2,7.88)
  rect 0.8x3.5 smd: 1(-3.175,19.3) 2(-1.905,19.3) 3(-0.635,19.3) 4(0.635,19.3) 5(1.905,19.3) 6(3.175,19.3)
  silkscreen extent -6.6,0.28 6.6,18.1, body extent -7.4,0.14 7.6,20.64, height 12
SJ [mm]
  rect 0.4x0.3 smd mask+0.05: 1(-0.253,0) 2(0.253,0)
  silkscreen extent -0.57,-0.22 0.57,0.22
SON127P600-8N-USON8 [mm] "GD25Q32-USON8 (3x2mm, 0.45mm thickness)"
  rect 0.8x0.25 smd: 1(-1.445,0.75) 2(-1.445,0.25) 3(-1.445,-0.25) 4(-1.445,-0.75) 5(1.445,-0.75) 6(1.445,-0.25) 7(1.445,0.25) 8(1.445,0.75)
  rect 0.2x1.6 smd: 9(0,0)
  silkscreen extent -2,-1.2 1.55,1.25, body extent -1.57,-1.05 1.57,1.05, height 0.5
SOT583 [mm]
  rect 0.67x0.3 smd paste+0 mask+0: 1(-0.74,0.75) 2(-0.74,0.25) 3(-0.74,-0.25) 4(-0.74,-0.75) 5(0.74,-0.75) 6(0.74,-0.25) 7(0.74,0.25) 8(0.74,0.75)
  silkscreen extent -1.27,-1.28 0.65,1.39, body extent -0.8,-1.05 0.8,1.05, height 0.6
SOT-23-5 [mm]
  rect 1.5x0.5 smd: 1(0,0)
  oval 1.5x0.5 smd: 2(0,-1) 3(0,-2) 4(2.8,-2) 5(2.8,0)
  silkscreen extent 0.92,-2.5 1.88,0.5, body extent -0.01,-2.45 2.79,0.45, height 1.45
sot-23-5 [mm]
  rect 1.5x0.5 smd: 1(0,0)
  oval 1.5x0.5 smd: 2(0,-1) 3(0,-2) 4(2.8,-2) 5(2.8,0)
  silkscreen extent 0.92,-2.5 1.88,0.5, body extent -0.01,-2.45 2.79,0.45, height 1.45
SOT-23-6 [mm]
  rect 1.45x0.55 smd: 1(-0.059,-0.066) 2(-0.059,-1.016) 3(-0.059,-1.966) 4(2.091,-1.966) 5(2.091,-1.016) 6(2.091,-0.066)
  silkscreen extent -0.59,-2.57 1.92,0.71, body extent -0.22,-2.41 2.21,0.38, height 1.08
T35-F324-BGA100P9X9-81A [mm]
  round 0.25 smd: A1(-5.525,5.525) A2(-4.875,5.525) A3(-4.225,5.525) A4(-3.575,5.525) A5(-2.925,5.525) A6(-2.275,5.525) A7(-1.625,5.525) A8(-0.975,5.525) A9(-0.325,5.525) A10(0.325,5.525) A11(0.975,5.525) A12(1.625,5.525) A13(2.275,5.525) A14(2.925,5.525) A15(3.575,5.525) A16(4.225,5.525) A17(4.875,5.525) A18(5.525,5.525) B1(-5.525,4.875) B2(-4.875,4.875) B3(-4.225,4.875) B4(-3.575,4.875) B5(-2.925,4.875) B6(-2.275,4.875) B7(-1.625,4.875) B8(-0.975,4.875) B9(-0.325,4.875) B10(0.325,4.875) B11(0.975,4.875) B12(1.625,4.875) B13(2.275,4.875) B14(2.925,4.875) B15(3.575,4.875) B16(4.225,4.875) B17(4.875,4.875) B18(5.525,4.875) C1(-5.525,4.225) C2(-4.875,4.225) C3(-4.225,4.225) C4(-3.575,4.225) C5(-2.925,4.225) C6(-2.275,4.225) C7(-1.625,4.225) C8(-0.975,4.225) C9(-0.325,4.225) C10(0.325,4.225) C11(0.975,4.225) C12(1.625,4.225) C13(2.275,4.225) C14(2.925,4.225) C15(3.575,4.225) C16(4.225,4.225) C17(4.875,4.225) C18(5.525,4.225) D1(-5.525,3.575) D2(-4.875,3.575) D3(-4.225,3.575) D4(-3.575,3.575) D5(-2.925,3.575) D6(-2.275,3.575) D7(-1.625,3.575) D8(-0.975,3.575) D9(-0.325,3.575) D10(0.325,3.575) D11(0.975,3.575) D12(1.625,3.575) D13(2.275,3.575) D14(2.925,3.575) D15(3.575,3.575) D16(4.225,3.575) D17(4.875,3.575) D18(5.525,3.575) E1(-5.525,2.925) E2(-4.875,2.925) E3(-4.225,2.925) E4(-3.575,2.925) E5(-2.925,2.925) E6(-2.275,2.925) E7(-1.625,2.925) E8(-0.975,2.925) E9(-0.325,2.925) E10(0.325,2.925) E11(0.975,2.925) E12(1.625,2.925) E13(2.275,2.925) E14(2.925,2.925) E15(3.575,2.925) E16(4.225,2.925) E17(4.875,2.925) E18(5.525,2.925) F1(-5.525,2.275) F2(-4.875,2.275) F3(-4.225,2.275) F4(-3.575,2.275) F5(-2.925,2.275) F6(-2.275,2.275) F7(-1.625,2.275) F8(-0.975,2.275) F9(-0.325,2.275) F10(0.325,2.275) F11(0.975,2.275) F12(1.625,2.275) F13(2.275,2.275) F14(2.925,2.275) F15(3.575,2.275) F16(4.225,2.275) F17(4.875,2.275) F18(5.525,2.275) G1(-5.525,1.625) G2(-4.875,1.625) G3(-4.225,1.625) G4(-3.575,1.625) G5(-2.925,1.625) G6(-2.275,1.625) G7(-1.625,1.625) G8(-0.975,1.625) G9(-0.325,1.625) G10(0.325,1.625) G11(0.975,1.625) G12(1.625,1.625) G13(2.275,1.625) G14(2.925,1.625) G15(3.575,1.625) G16(4.225,1.625) G17(4.875,1.625) G18(5.525,1.625) H1(-5.525,0.975) H2(-4.875,0.975) H3(-4.225,0.975) H4(-3.575,0.975) H5(-2.925,0.975) H6(-2.275,0.975) H7(-1.625,0.975) H8(-0.975,0.975) H9(-0.325,0.975) H10(0.325,0.975) H11(0.975,0.975) H12(1.625,0.975) H13(2.275,0.975) H14(2.925,0.975) H15(3.575,0.975) H16(4.225,0.975) H17(4.875,0.975) H18(5.525,0.975) J1(-5.525,0.325) J2(-4.875,0.325) J3(-4.225,0.325) J4(-3.575,0.325) J5(-2.925,0.325) J6(-2.275,0.325) J7(-1.625,0.325) J8(-0.975,0.325) J9(-0.325,0.325) J10(0.325,0.325) J11(0.975,0.325) J12(1.625,0.325) J13(2.275,0.325) J14(2.925,0.325) J15(3.575,0.325) J16(4.225,0.325) J17(4.875,0.325) J18(5.525,0.325) K1(-5.525,-0.325) K2(-4.875,-0.325) K3(-4.225,-0.325) K4(-3.575,-0.325) K5(-2.925,-0.325) K6(-2.275,-0.325) K7(-1.625,-0.325) K8(-0.975,-0.325) K9(-0.325,-0.325) K10(0.325,-0.325) K11(0.975,-0.325) K12(1.625,-0.325) K13(2.275,-0.325) K14(2.925,-0.325) K15(3.575,-0.325) K16(4.225,-0.325) K17(4.875,-0.325) K18(5.525,-0.325) L1(-5.525,-0.975) L2(-4.875,-0.975) L3(-4.225,-0.975) L4(-3.575,-0.975) L5(-2.925,-0.975) L6(-2.275,-0.975) L7(-1.625,-0.975) L8(-0.975,-0.975) L9(-0.325,-0.975) L10(0.325,-0.975) L11(0.975,-0.975) L12(1.625,-0.975) L13(2.275,-0.975) L14(2.925,-0.975) L15(3.575,-0.975) L16(4.225,-0.975) L17(4.875,-0.975) L18(5.525,-0.975) M1(-5.525,-1.625) M2(-4.875,-1.625) M3(-4.225,-1.625) M4(-3.575,-1.625) M5(-2.925,-1.625) M6(-2.275,-1.625) M7(-1.625,-1.625) M8(-0.975,-1.625) M9(-0.325,-1.625) M10(0.325,-1.625) M11(0.975,-1.625) M12(1.625,-1.625) M13(2.275,-1.625) M14(2.925,-1.625) M15(3.575,-1.625) M16(4.225,-1.625) M17(4.875,-1.625) M18(5.525,-1.625) N1(-5.525,-2.275) N2(-4.875,-2.275) N3(-4.225,-2.275) N4(-3.575,-2.275) N5(-2.925,-2.275) N6(-2.275,-2.275) N7(-1.625,-2.275) N8(-0.975,-2.275) N9(-0.325,-2.275) N10(0.325,-2.275) N11(0.975,-2.275) N12(1.625,-2.275) N13(2.275,-2.275) N14(2.925,-2.275) N15(3.575,-2.275) N16(4.225,-2.275) N17(4.875,-2.275) N18(5.525,-2.275) P1(-5.525,-2.925) P2(-4.875,-2.925) P3(-4.225,-2.925) P4(-3.575,-2.925) P5(-2.925,-2.925) P6(-2.275,-2.925) P7(-1.625,-2.925) P8(-0.975,-2.925) P9(-0.325,-2.925) P10(0.325,-2.925) P11(0.975,-2.925) P12(1.625,-2.925) P13(2.275,-2.925) P14(2.925,-2.925) P15(3.575,-2.925) P16(4.225,-2.925) P17(4.875,-2.925) P18(5.525,-2.925) R1(-5.525,-3.575) R2(-4.875,-3.575) R3(-4.225,-3.575) R4(-3.575,-3.575) R5(-2.925,-3.575) R6(-2.275,-3.575) R7(-1.625,-3.575) R8(-0.975,-3.575) R9(-0.325,-3.575) R10(0.325,-3.575) R11(0.975,-3.575) R12(1.625,-3.575) R13(2.275,-3.575) R14(2.925,-3.575) R15(3.575,-3.575) R16(4.225,-3.575) R17(4.875,-3.575) R18(5.525,-3.575) T1(-5.525,-4.225) T2(-4.875,-4.225) T3(-4.225,-4.225) T4(-3.575,-4.225) T5(-2.925,-4.225) T6(-2.275,-4.225) T7(-1.625,-4.225) T8(-0.975,-4.225) T9(-0.325,-4.225) T10(0.325,-4.225) T11(0.975,-4.225) T12(1.625,-4.225) T13(2.275,-4.225) T14(2.925,-4.225) T15(3.575,-4.225) T16(4.225,-4.225) T17(4.875,-4.225) T18(5.525,-4.225) U1(-5.525,-4.875) U2(-4.875,-4.875) U3(-4.225,-4.875) U4(-3.575,-4.875) U5(-2.925,-4.875) U6(-2.275,-4.875) U7(-1.625,-4.875) U8(-0.975,-4.875) U9(-0.325,-4.875) U10(0.325,-4.875) U11(0.975,-4.875) U12(1.625,-4.875) U13(2.275,-4.875) U14(2.925,-4.875) U15(3.575,-4.875) U16(4.225,-4.875) U17(4.875,-4.875) U18(5.525,-4.875) V1(-5.525,-5.525) V2(-4.875,-5.525) V3(-4.225,-5.525) V4(-3.575,-5.525) V5(-2.925,-5.525) V6(-2.275,-5.525) V7(-1.625,-5.525) V8(-0.975,-5.525) V9(-0.325,-5.525) V10(0.325,-5.525) V11(0.975,-5.525) V12(1.625,-5.525) V13(2.275,-5.525) V14(2.925,-5.525) V15(3.575,-5.525) V16(4.225,-5.525) V17(4.875,-5.525) V18(5.525,-5.525)
  silkscreen extent -6.33,-6 6,6.34, body extent -6,-6 6,6, height 0.97
TLP281-1 [mm]
  rect 2x0.686 smd: 1(-0.002,-0.004)
  oval 2x0.686 smd: 2(-0.002,-1.274) 3(6,-1.274) 4(6,-0.004)
  silkscreen extent 1.55,-1.8 4.5,0.63, body extent -0.61,-1.86 6.5,0.74, height 2
TP-S [mm]
  round 0.8 smd: 1(0,0)
  silkscreen extent -0.46,-0.46 0.46,0.46
UDFN-8LL [mm] "For B424CA1A-NTRC, PSON, 8-Leads, Body 2.00x3.00mm, Pitch 0.50mm, Thermal Pad 1.40x1.40mm, IPC Medium Density"
  rect 0.6x0.35 smd: 1(-1.405,0.75) 2(-1.405,0.25) 3(-1.405,-0.25) 4(-1.405,-0.75) 5(1.405,-0.75) 6(1.405,-0.25) 7(1.405,0.25) 8(1.405,0.75)
  rect 1.3x1.4 smd: 9(0,0)
  silkscreen extent -2.04,-1.17 1.88,1.38, body extent -1.55,-1.05 1.55,1.05, height 0.6
VQFN-20 [mm]
  rect 0.24x0.85 smd mask+0.05: 1(-0.25,2.15)
  oval 0.85x0.24 smd mask+0.05: 2(-1.15,1.75) 3(-1.15,1.25) 4(-1.15,0.75) 5(-1.15,0.25) 6(-1.15,-0.25) 7(-1.15,-0.75) 8(-1.15,-1.25) 9(-1.15,-1.75) 12(1.15,-1.75) 13(1.15,-1.25) 14(1.15,-0.75) 15(1.15,-0.25) 16(1.15,0.25) 17(1.15,0.75) 18(1.15,1.25) 19(1.15,1.75)
  oval 0.24x0.85 smd mask+0.05: 10(-0.25,-2.15) 11(0.25,-2.15) 20(0.25,2.15)
  rect 0.9x2.8 smd mask+0.05: 21(0,0)
  silkscreen extent -1.27,-2.41 1.27,2.41, body extent -1.25,-2.24 1.25,2.26, height 0.85
XTAL_SMD_SMALL [mm]
  rect 1.5x0.9 smd: 1(-1.35,-0.8) 2(1.35,-0.8) 3(1.35,0.8) 4(-1.35,0.8)
  silkscreen extent -2.49,-1.58 1.59,1.49, body extent -1.55,-1.24 1.65,1.26, height 0.55